# Altium PCB EVB_MBD_AK376xE_V1.0.0.PcbDoc (part 1 of 5)
Units mil, origin at the board's own origin, x right, y up, seen from the top; angles counter-clockwise.
Board outline 7060.01 x 5460.01 mil, 4 copper layers (Top, Layer 1, Layer 2, Bottom), stack 5.512 mil thick; 344 components, 305 nets, 1421 pads, 1325 vias.
Unrouted connection lines stored in the file: 947.
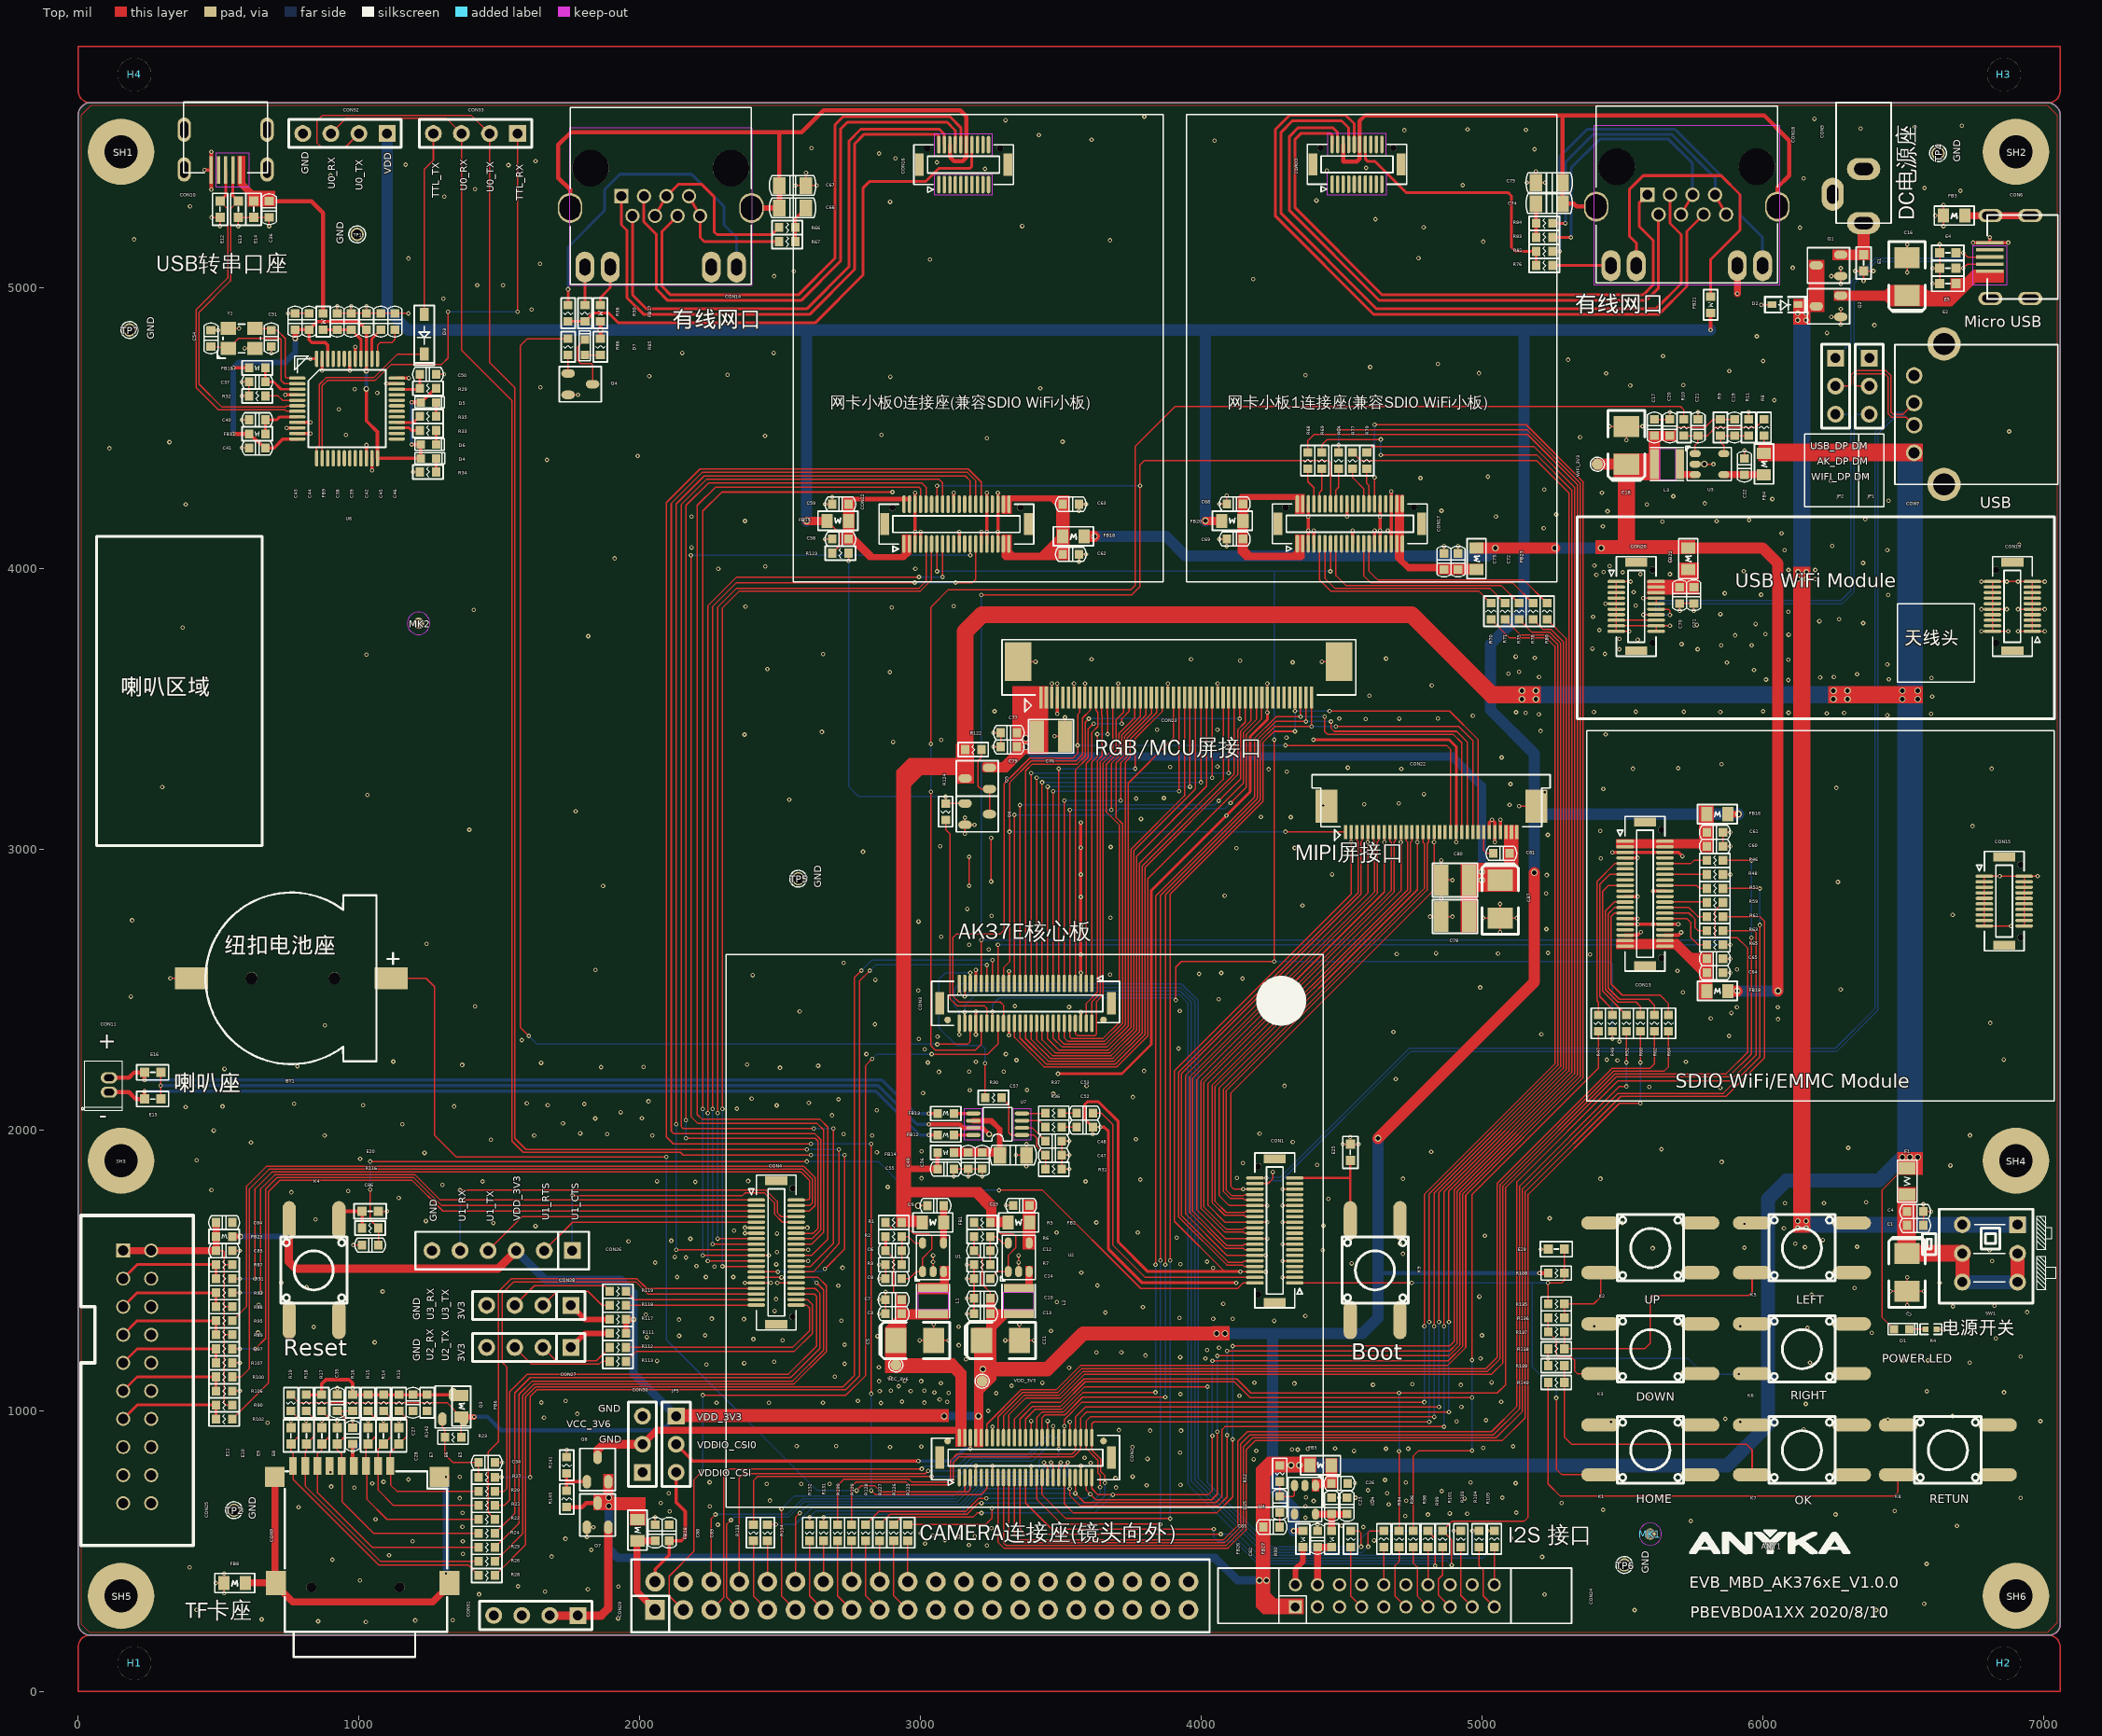
[diagram p0: Top view]
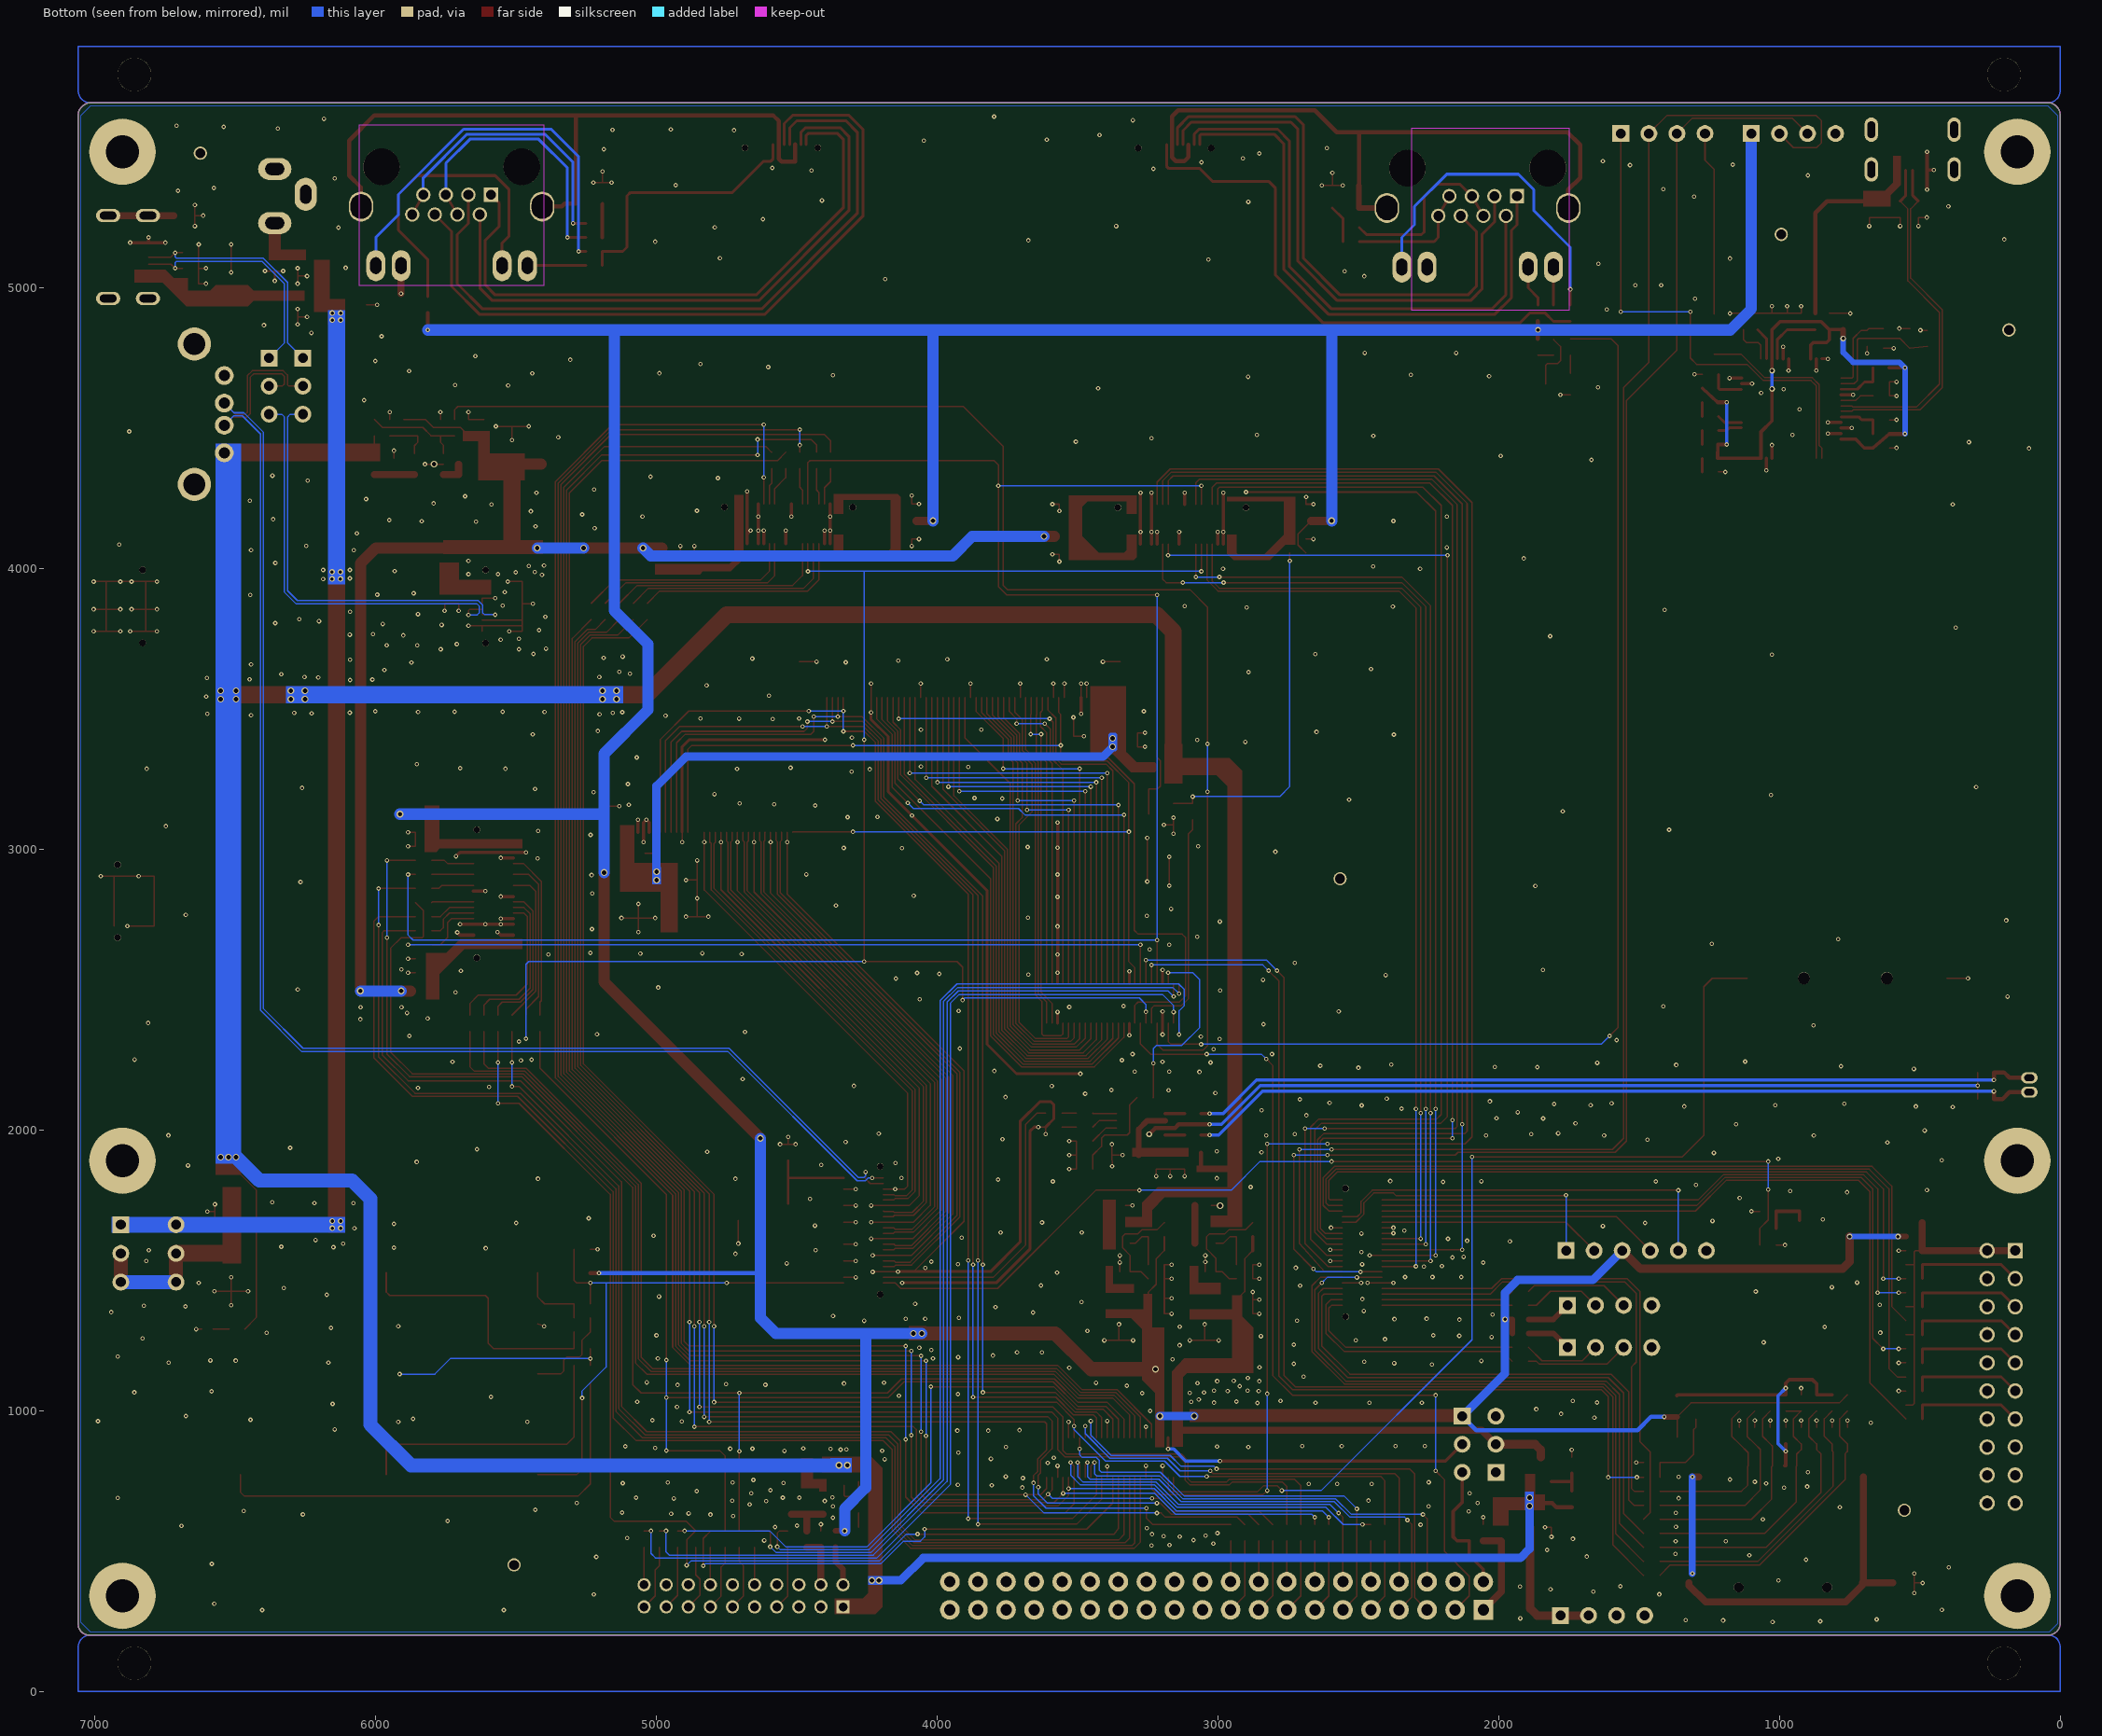
[diagram p1: Bottom view, seen from below]
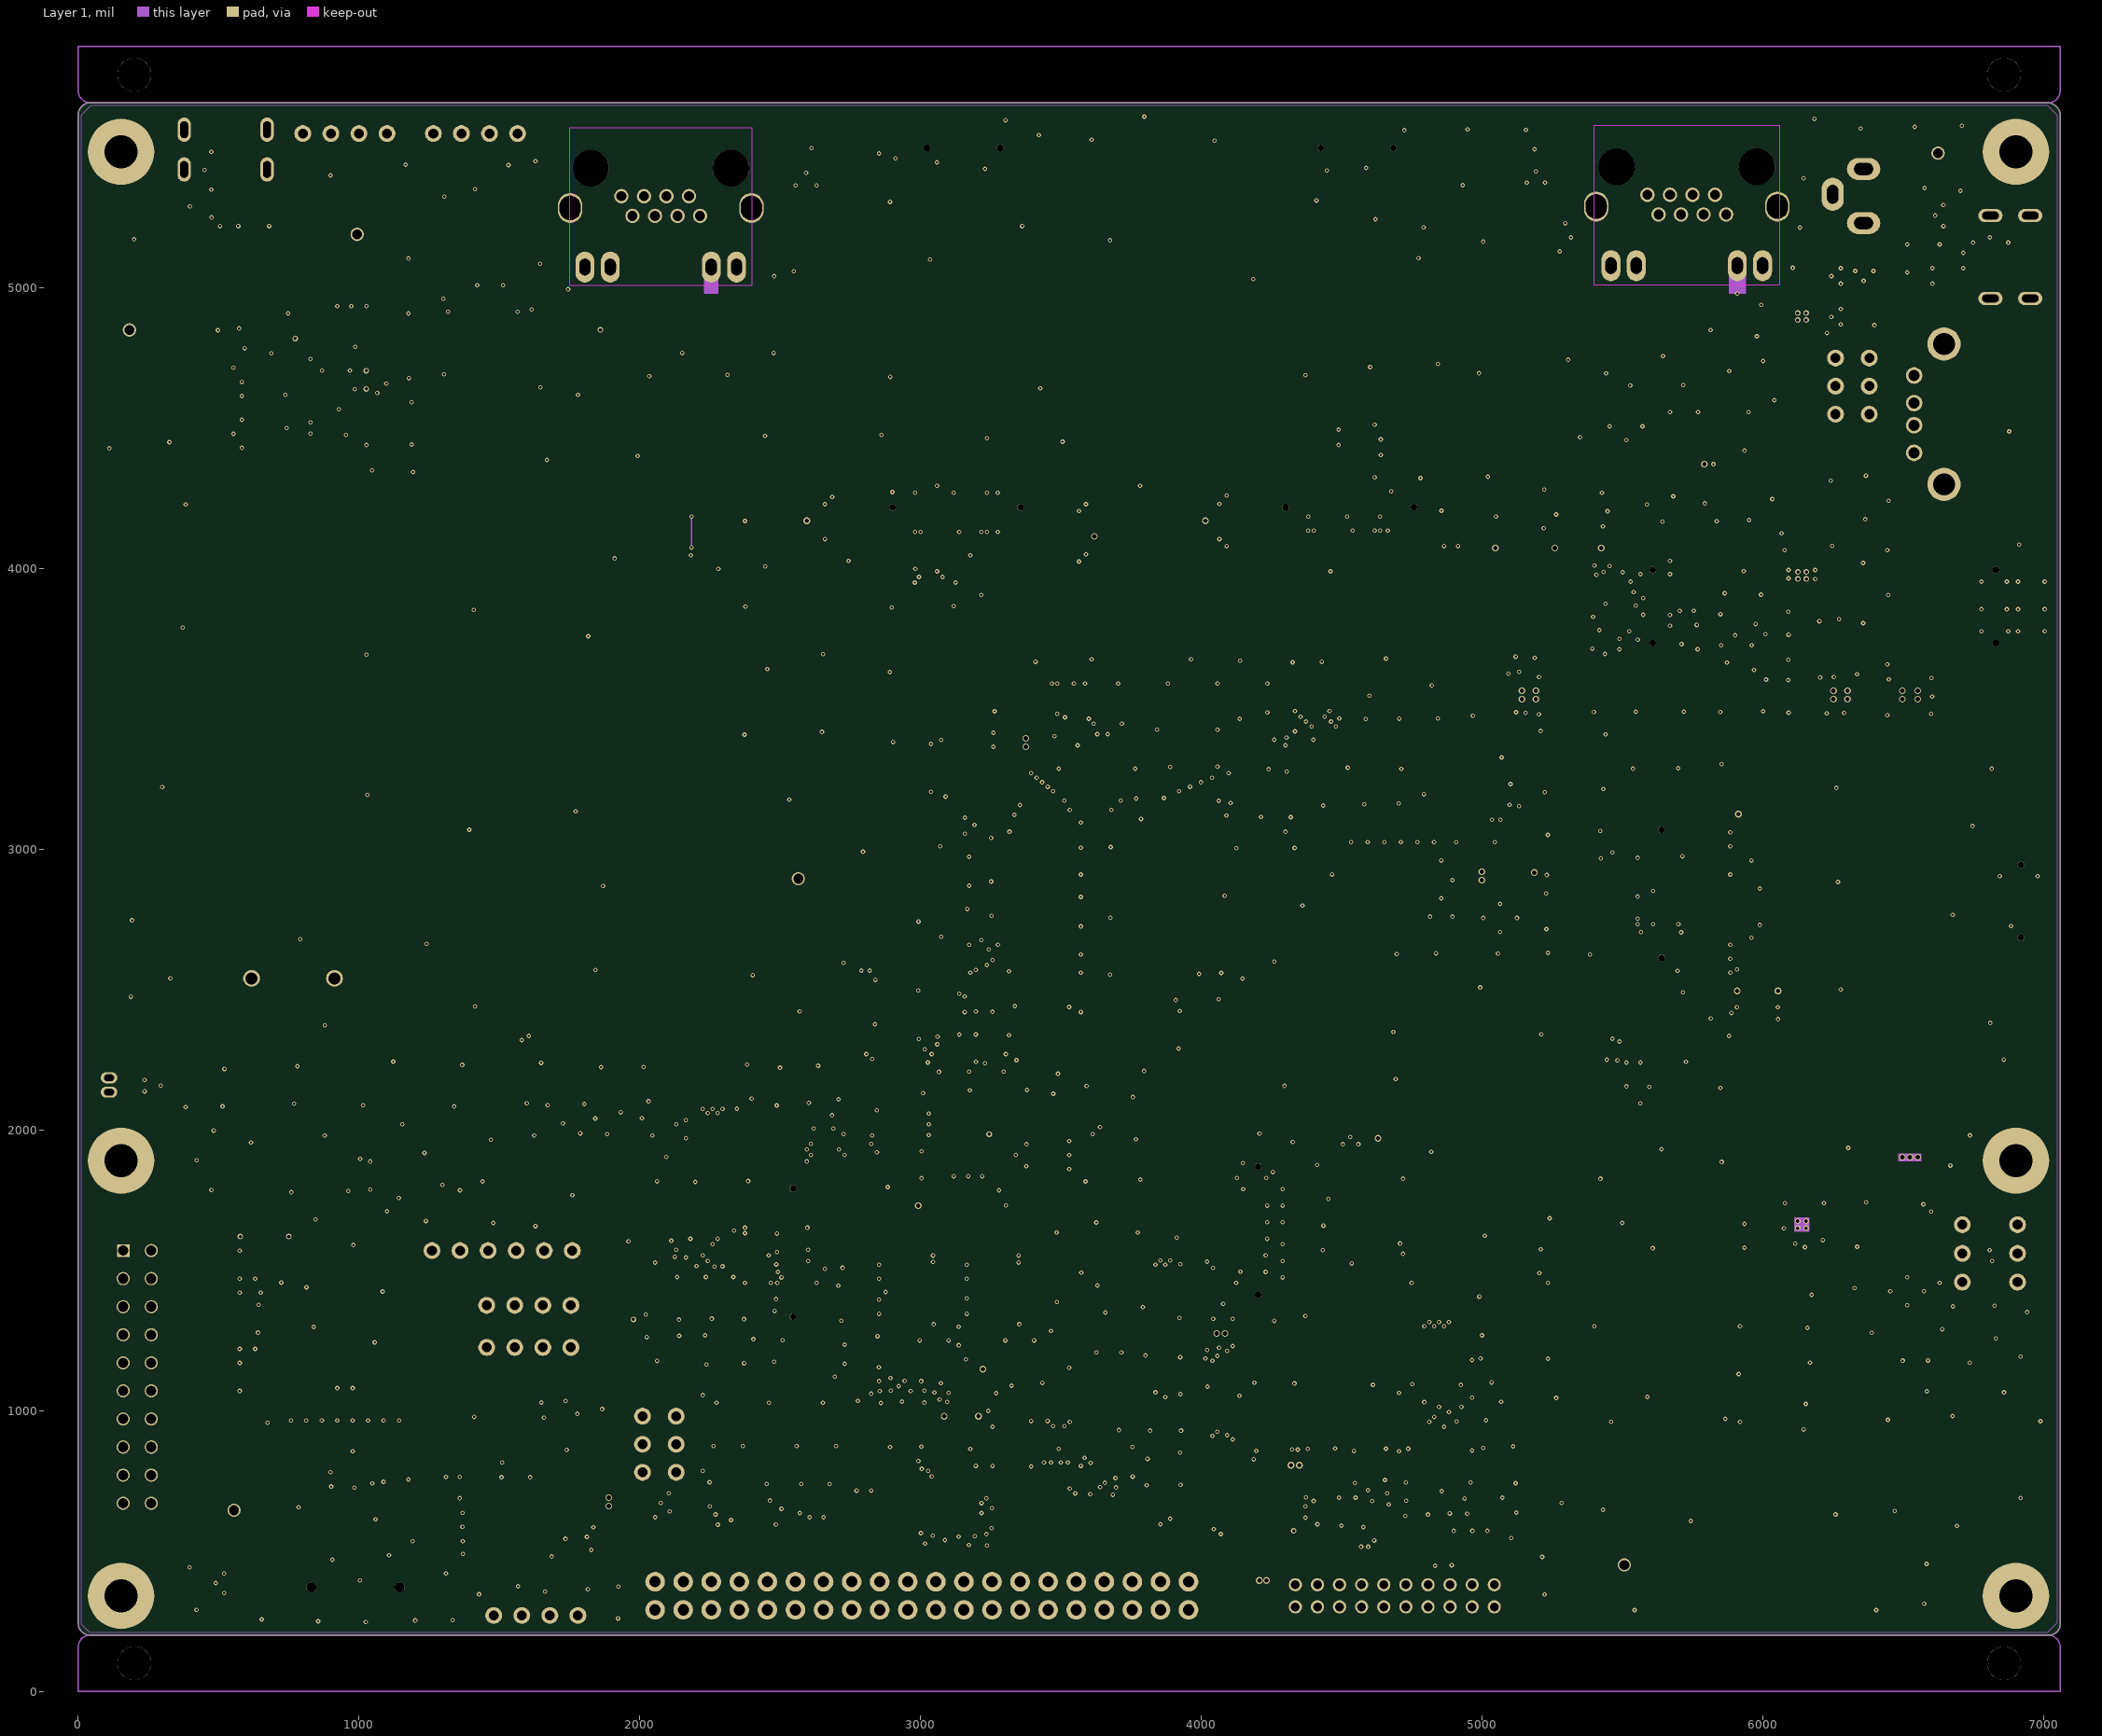
[diagram p2: Layer 1]
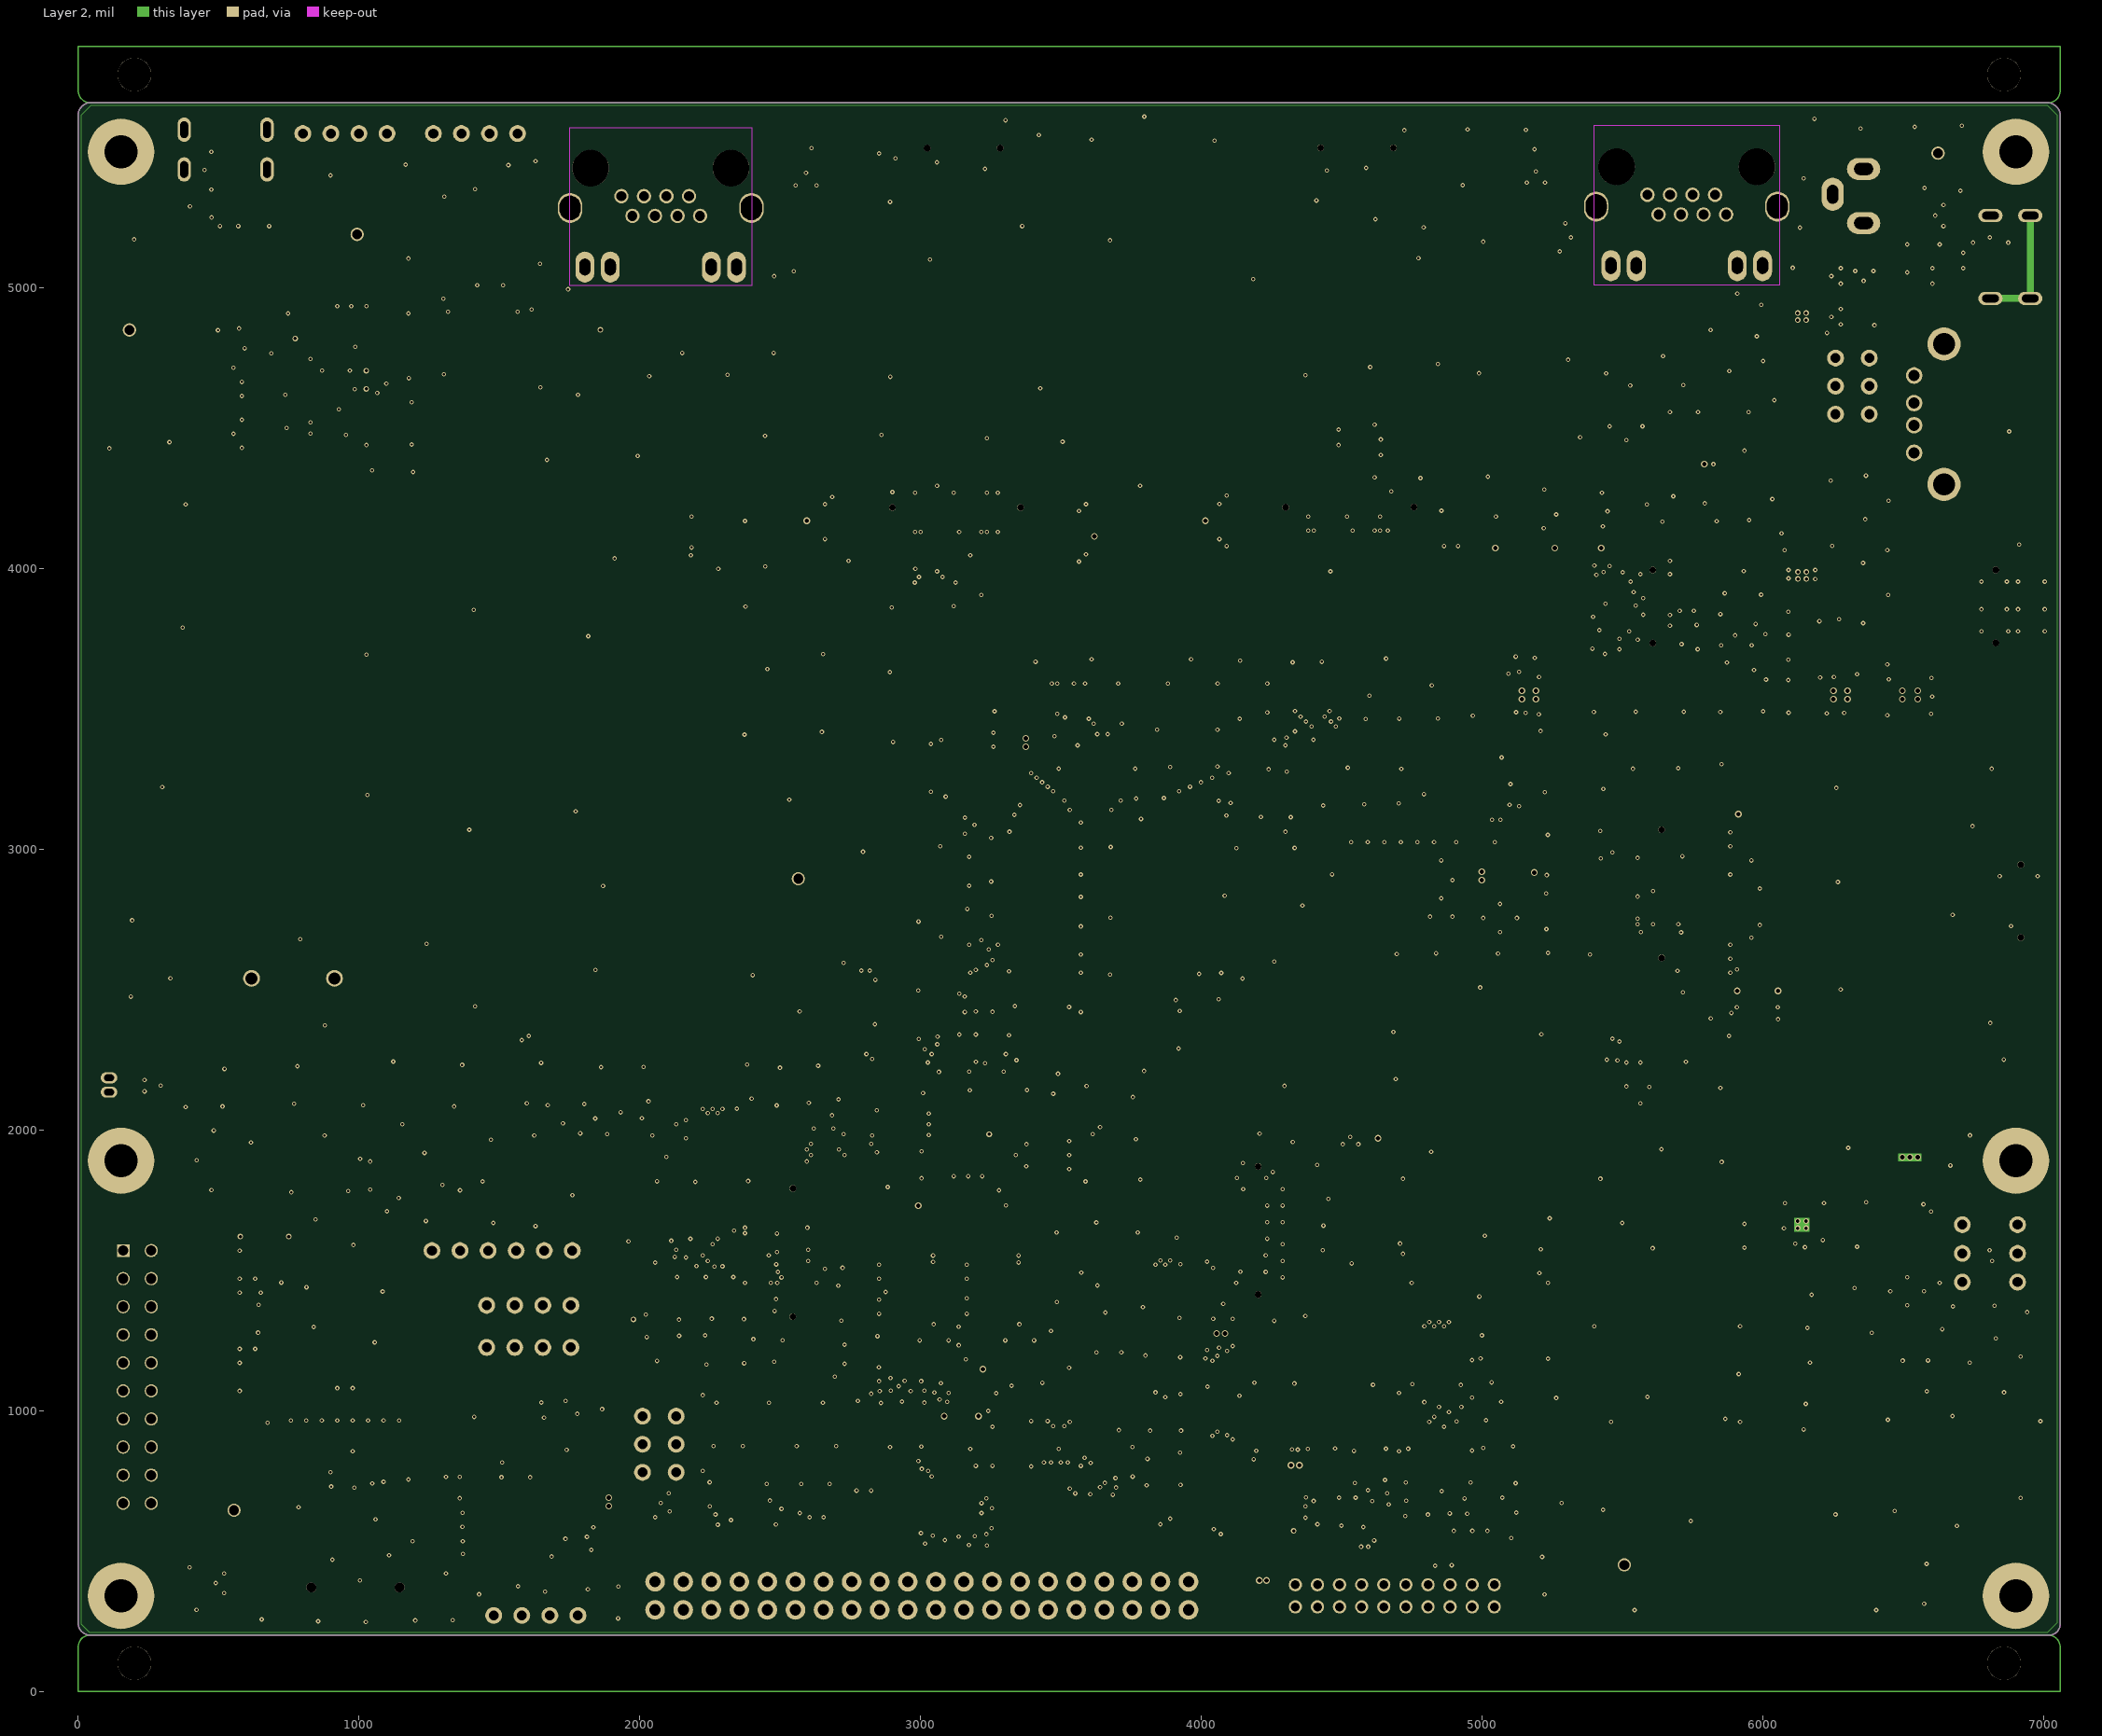
[diagram p3: Layer 2]

## Layer stack, top to bottom
Solder Mask Top: solder mask 0.4, Solder Resist, Dk 3.5
Top: signal copper 1.378
Layer 1: signal copper 1.378
Layer 2: signal copper 1.378
Bottom: signal copper 1.378
Solder Mask Bottom: solder mask 0.4, Solder Resist, Dk 3.5

## Board outline
40,200 7020,200 7020.01,200 ccw(c7020.83,239.17) 7060,240 7060,5620 7060,5619.98 ccw(c7012.25,5612.25) 7020,5660 40,5660 39.97,5660 ccw(c45.75,5614.25) 0,5620 0,240 0,239.98 ccw(c42.5,242.5)

## Design rules (kind name [scope] priority, off if disabled: settings)
Clearance "Clearance - Net - USB1_DM" [InNet('USB1_DM')] p1: gap=5 ignorepadtopadclearanceinfootprint=FALSE except(0: Arc-Hole Track-Hole SMDPad-Hole THPad-Hole Via-Hole Fill-Hole Poly-Hole Region-Hole Text-Hole; 6: SMDPad-Fill SMDPad-Poly SMDPad-Region Via-Fill Via-Poly Via-Region; 8: THPad-Fill THPad-Poly THPad-Region; 10: Text-Text)
Clearance "Clearance - Net - USB1_DP" [InNet('USB1_DP')] p2: gap=5 ignorepadtopadclearanceinfootprint=FALSE except(0: Arc-Hole Track-Hole SMDPad-Hole THPad-Hole Via-Hole Fill-Hole Poly-Hole Region-Hole Text-Hole; 7.5: SMDPad-Fill SMDPad-Poly SMDPad-Region; 8: THPad-Fill THPad-Poly THPad-Region Via-Fill Via-Poly Via-Region; 10: Text-Text)
Clearance "Clearance - Default - DEFAULT - Via" [IsVia vs IsVia] p3: gap=0 ignorepadtopadclearanceinfootprint=FALSE
Clearance "Clearance - Default - DEFAULT- SMD" [IsVia vs IsSMTPin] p4: gap=0 ignorepadtopadclearanceinfootprint=FALSE
Clearance "Clearance - Default - DEFAULT - Net" [All] p5: gap=5 ignorepadtopadclearanceinfootprint=FALSE except(0: Arc-Hole Track-Hole SMDPad-Hole THPad-Hole Via-Hole Fill-Hole Poly-Hole Region-Hole Text-Hole; 7.5: SMDPad-Fill SMDPad-Poly SMDPad-Region; 8: THPad-Fill THPad-Poly THPad-Region Via-Fill Via-Poly Via-Region Fill-Fill Fill-Poly Fill-Region Poly-Poly Poly-Region Region-Region; 10: Text-Text)
ComponentClearance "ComponentClearance - Default - DEFAULT" [All] p1: gap=0 collisioncheckmode=3 verticalgap=10 showdistances=FALSE
FanoutControl Fanout_Small [(CompPinCount < 5)] p1: bgadir=Out bgaviamode=Centered fanoutstyle=Auto fanoutdirection=OutThenIn viagrid=1 // Fanout_Small (Default Rule)
FanoutControl Fanout_BGA [IsBGA] p2: bgadir=Out bgaviamode=Centered fanoutstyle=Auto fanoutdirection=Alternating viagrid=1 // Fanout_BGA (Default Rule)
FanoutControl Fanout_LCC [IsLCC] p3: bgadir=Out bgaviamode=Centered fanoutstyle=Auto fanoutdirection=Alternating viagrid=1 // Fanout_LCC (Default Rule)
FanoutControl Fanout_SOIC [IsSOIC] p4: bgadir=Out bgaviamode=Centered fanoutstyle=Auto fanoutdirection=Alternating viagrid=1 // Fanout_SOIC (Default Rule)
HoleToHoleClearance "HoleToHoleClearance - Default - DEFAULT" [All] p1: gap=0 allowstackedmicrovias=TRUE
Length "Default Length" [All] p1: maxlimit=50000 minlimit=0
MaxMinImpedance "Default Impedance" [All] p1: minimum=50.00 maximum=150.0
ParallelSegment "Default Parallel Segment Adjasent" [All] p1: limit=1000 gap=200
ParallelSegment "Default Parallel Segment Same Layer" [All] p2: limit=1000 gap=200
PlaneConnect "Default PlaneConnect" [All] p1: planeconnectstyle=Direct reliefexpansion=20 reliefentries=4 reliefconductorwidth=10 reliefairgap=10
PolygonConnect "PolygonConnect - Default SMT" [IsSMTPin] p1: connectstyle=Direct reliefconductorwidth=10 reliefentries=4 polygonreliefangle="45 Angle" airgapwidth=10
PolygonConnect "PolygonConnect - Default Pad" [All] p2: connectstyle=Direct reliefconductorwidth=10 reliefentries=4 polygonreliefangle="45 Angle" airgapwidth=10
RoomDefinition TF_PA_UART [InComponentClass('TF_PA_UART')] p1: confinementstyle=ConfineIn formatcopy=TRUE lockcomponents=FALSE outline -19060,-24260 -17060,-24260 -17060,-23260 -19060,-23260
RoomDefinition POWER [InComponentClass('POWER')] p2: confinementstyle=ConfineIn formatcopy=TRUE lockcomponents=FALSE outline -19060,-24260 -17060,-24260 -17060,-23260 -19060,-23260
RoomDefinition MAC_EMMC_USBWIFI [InComponentClass('MAC_EMMC_USBWIFI')] p3: confinementstyle=ConfineIn formatcopy=TRUE lockcomponents=FALSE outline -19060,-24260 -17060,-24260 -17060,-23260 -19060,-23260
RoomDefinition LCD [InComponentClass('LCD')] p4: confinementstyle=ConfineIn formatcopy=TRUE lockcomponents=FALSE outline -19060,-24260 -17060,-24260 -17060,-23260 -19060,-23260
RoomDefinition JTAG_I2S_KEY [InComponentClass('JTAG_I2S_KEY')] p5: confinementstyle=ConfineIn formatcopy=TRUE lockcomponents=FALSE outline -19060,-24260 -17060,-24260 -17060,-23260 -19060,-23260
RoomDefinition INTERFACE_CORE [InComponentClass('INTERFACE_CORE')] p6: confinementstyle=ConfineIn formatcopy=TRUE lockcomponents=FALSE outline -19060,-24260 -17060,-24260 -17060,-23260 -19060,-23260
RoutingLayers "RoutingLayers - Default - DEFAULT" [All] p1: top layer_v5=TRUE mid layer 1_v5=TRUE mid layer 2_v5=TRUE bottom layer_v5=TRUE
RoutingPriority "RoutingPriority - Default - DEFAULT" [All] p1: routingpriority=0
RoutingTopology "Default Routing Topology" [All] p1: topology=Shortest
RoutingVias "RoutingVias - Default - DEFAULT" [All] p1: holewidth=16 width=24 viastyle="Through Hole" minholewidth=16 minwidth=24 maxholewidth=16 maxwidth=24
SMDToCorner "SMDToCorner - Default - DEFAULT" [All] p1: distance=0
SolderMaskExpansion [All] p1: expansion=4 istentingtop=FALSE
Width "Default Width" [All] p1: maxlimit=100 minlimit=5 preferedwidth=5
18 further rules are at their usual default settings.

## Classes and differential pairs
component class TF_PA_UART: C27 C28 C34 C35 C36 C37 C38 C39 C40 C41 C42 C43 C44 C45 C46 C47 C48 C49 C50 C51 C52 C53 C54 C55 C56 C57 CON9 CON10 CON11 CON32 CON33 D3 D4 D5 D6 E5 E6 E7 E8 E9 E10 E11 E12 E13 E14 E15 E16 FB6 FB8 FB9 FB10 FB11 FB12 FB13 FB14 Q3 R13 R14 R15 R16 R17 R18 R19 R20 R21 R22 R23 R24 R25 R26 R27 R28 R29 R30 R31 R32 R33 R34 R35 R36 R37 R142 U6 U7 Y1
component class POWER: BT1 C1 C2 C3 C4 C5 C6 C7 C8 C9 C10 C11 C12 C13 C14 C15 C16 C17 C18 C19 C20 C21 C22 C23 C24 C25 C26 CON5 CON6 CON7 CON30 CON31 D1 D2 E1 E2 E3 E4 F1 FB1 FB2 FB3 FB4 FB5 JP1 JP2 JP5 L1 L2 L3 Q1 Q2 Q7 Q8 R1 R2 R3 R4 R5 R6 R7 R8 R9 R10 R11 R12 R141 R143 SW1 U1 U2 U3 U4 VCC_3V6 VDD_3V3 WIFI_3V3
component class MAC_EMMC_USBWIFI: C58 C59 C60 C61 C62 C63 C64 C65 C66 C67 C68 C69 C70 C71 C72 C73 C74 C75 CON12 CON13 CON14 CON15 CON16 CON17 CON18 CON19 CON20 CON21 FB15 FB16 FB17 FB18 FB19 FB20 FB21 FB22 FB23 R46 R47 R48 R49 R50 R51 R52 R58 R59 R60 R61 R62 R63 R64 R65 R66 R67 R76 R81 R83 R84
component class LCD: C76 C77 C78 C79 C80 C81 C87 C88 C89 CON22 CON23 CON29 D7 FB28 Q4 Q5 Q6 R68 R69 R70 R71 R74 R75 R77 R78 R79 R80 R85 R86 R122 R123 R124 R125 R126 R127 R128 R129 R130 R131 R132 R133 R134 TP1 TP2 TP4 TP5 TP6 TP7
component class JTAG_I2S_KEY: C82 C83 C84 C85 C86 CON24 CON25 CON26 CON27 CON28 E19 E20 E25 FB25 FB26 FB27 K1 K2 K3 K4 K5 K6 K7 K8 K9 R87 R88 R89 R90 R91 R92 R93 R94 R95 R96 R97 R98 R99 R100 R101 R102 R103 R104 R105 R106 R107 R108 R111 R112 R113 R116 R117 R118 R119 R135 R136 R137 R138 R139 R140
component class INTERFACE_CORE: CON1 CON2 CON3 CON4

## Components (designator, comment, footprint, x,y, rotation, side; value= is the part's Value field where it differs from the comment)
ANY1 "LOGO_ANYKA" FileName=\\172.10.10.37\部门文件夹\系统平台研发中心\系统硬件部\AD_Library\AD_Footprint.PcbLib#1 6027.5,517.5 r0 top
BT1 "BAT_CR1220" FileName=\\172.10.10.37\部门文件夹\系统平台研发中心\系统硬件部\AD_Library\\AD_Footprint.PcbLib#1 767,2540 r0 top value=BAT/CR1220
C1 "C0603" FileName=\\172.10.10.37\部门文件夹\系统平台研发中心\系统硬件部\AD_Library\\AD_Footprint.PcbLib#2 6544,1660 r180 top value=100nF
C2 "220uF" FileName=\\172.10.10.37\部门文件夹\系统平台研发中心\系统硬件部\AD_Library\\AD_Footprint.PcbLib#3 6515,1492.5 r90 top value=220uF/6.3V
C3 "C0603" FileName=\\172.10.10.37\部门文件夹\系统平台研发中心\系统硬件部\AD_Library\\AD_Footprint.PcbLib#2 2905,1344.72 r0 top value=100nF
C4 "4.7uF" FileName=\\172.10.10.37\部门文件夹\系统平台研发中心\系统硬件部\AD_Library\\AD_Footprint.PcbLib#2 6544,1709 r0 top
C5 "220uF" FileName=\\172.10.10.37\部门文件夹\系统平台研发中心\系统硬件部\AD_Library\\AD_Footprint.PcbLib#3 2980,1250 r180 top value=220uF/6.3V
C6 "10pF" FileName=\\172.10.10.37\部门文件夹\系统平台研发中心\系统硬件部\AD_Library\\AD_Footprint.PcbLib#2 2905,1570 r0 top
C7 "10uF" FileName=\\172.10.10.37\部门文件夹\系统平台研发中心\系统硬件部\AD_Library\\AD_Footprint.PcbLib#2 2905,1395 r180 top
C8 "C0603" FileName=\\172.10.10.37\部门文件夹\系统平台研发中心\系统硬件部\AD_Library\\AD_Footprint.PcbLib#2 2905,1470 r0 top value=NC/100nF
C9 "4.7uF" FileName=\\172.10.10.37\部门文件夹\系统平台研发中心\系统硬件部\AD_Library\\AD_Footprint.PcbLib#2 3053.4,1730 r180 top
C10 "C0603" FileName=\\172.10.10.37\部门文件夹\系统平台研发中心\系统硬件部\AD_Library\\AD_Footprint.PcbLib#2 3220,1400 r0 top value=100nF
C11 "220uF" FileName=\\172.10.10.37\部门文件夹\系统平台研发中心\系统硬件部\AD_Library\\AD_Footprint.PcbLib#3 3285,1250 r180 top value=220uF/6.3V
C12 "10pF" FileName=\\172.10.10.37\部门文件夹\系统平台研发中心\系统硬件部\AD_Library\\AD_Footprint.PcbLib#2 3220,1570 r0 top
C13 "10uF" FileName=\\172.10.10.37\部门文件夹\系统平台研发中心\系统硬件部\AD_Library\\AD_Footprint.PcbLib#2 3220,1344.72 r180 top
C14 "C0603" FileName=\\172.10.10.37\部门文件夹\系统平台研发中心\系统硬件部\AD_Library\\AD_Footprint.PcbLib#2 3220,1470 r0 top value=NC/100nF
C15 "4.7uF" FileName=\\172.10.10.37\部门文件夹\系统平台研发中心\系统硬件部\AD_Library\\AD_Footprint.PcbLib#2 3359,1731 r180 top
C16 "220uF" FileName=\\172.10.10.37\部门文件夹\系统平台研发中心\系统硬件部\AD_Library\\AD_Footprint.PcbLib#3 6515,5040 r270 top value=220uF/6.3V
C17 "C0603" FileName=\\172.10.10.37\部门文件夹\系统平台研发中心\系统硬件部\AD_Library\\AD_Footprint.PcbLib#2 5614.72,4502.5 r270 top value=100nF
C18 "220uF" FileName=\\172.10.10.37\部门文件夹\系统平台研发中心\系统硬件部\AD_Library\\AD_Footprint.PcbLib#3 5515,4439.1 r270 top value=220uF/6.3V
C19 "10pF" FileName=\\172.10.10.37\部门文件夹\系统平台研发中心\系统硬件部\AD_Library\\AD_Footprint.PcbLib#2 5900,4502.5 r270 top
C20 "10uF" FileName=\\172.10.10.37\部门文件夹\系统平台研发中心\系统硬件部\AD_Library\\AD_Footprint.PcbLib#2 5670,4502.5 r90 top
C21 "C0603" FileName=\\172.10.10.37\部门文件夹\系统平台研发中心\系统硬件部\AD_Library\\AD_Footprint.PcbLib#2 5770,4502.5 r270 top value=NC/100nF
C22 "4.7uF" FileName=\\172.10.10.37\部门文件夹\系统平台研发中心\系统硬件部\AD_Library\\AD_Footprint.PcbLib#2 5935,4363.5 r90 top
C23 "C0603" FileName=\\172.10.10.37\部门文件夹\系统平台研发中心\系统硬件部\AD_Library\\AD_Footprint.PcbLib#2 4465,660 r270 top value=100nF
C24 "10uF" FileName=\\172.10.10.37\部门文件夹\系统平台研发中心\系统硬件部\AD_Library\\AD_Footprint.PcbLib#2 4520,660 r90 top
C25 "C0603" FileName=\\172.10.10.37\部门文件夹\系统平台研发中心\系统硬件部\AD_Library\\AD_Footprint.PcbLib#2 4280,665 r90 top value=NC/100nF
C26 "4.7uF" FileName=\\172.10.10.37\部门文件夹\系统平台研发中心\系统硬件部\AD_Library\\AD_Footprint.PcbLib#2 4492.5,740 r0 top
C27 "100nF" FileName=\\172.10.10.37\部门文件夹\系统平台研发中心\系统硬件部\AD_Library\\AD_Footprint.PcbLib#2 1192.5,1027.5 r270 top
C28 "10uF" FileName=\\172.10.10.37\部门文件夹\系统平台研发中心\系统硬件部\AD_Library\\AD_Footprint.PcbLib#2 977.5,910 r90 top
C34 "100nF" FileName=\\172.10.10.37\部门文件夹\系统平台研发中心\系统硬件部\AD_Library\\AD_Footprint.PcbLib#2 1455,815 r0 top
C35 "NC/100nF" FileName=\\172.10.10.37\部门文件夹\系统平台研发中心\系统硬件部\AD_Library\\AD_Footprint.PcbLib#2 922.5,1027.5 r90 top
C36 "10uF" FileName=\\172.10.10.37\部门文件夹\系统平台研发中心\系统硬件部\AD_Library\\AD_Footprint.PcbLib#2 680,5280 r90 top
C37 "100nF" FileName=\\172.10.10.37\部门文件夹\系统平台研发中心\系统硬件部\AD_Library\\AD_Footprint.PcbLib#2 637.5,4665 r180 top
C38 "100nF" FileName=\\172.10.10.37\部门文件夹\系统平台研发中心\系统硬件部\AD_Library\\AD_Footprint.PcbLib#2 922.5,4880 r90 top
C39 "10uF" FileName=\\172.10.10.37\部门文件夹\系统平台研发中心\系统硬件部\AD_Library\\AD_Footprint.PcbLib#2 972.5,4880 r90 top
C40 "100nF" FileName=\\172.10.10.37\部门文件夹\系统平台研发中心\系统硬件部\AD_Library\\AD_Footprint.PcbLib#2 637.5,4530 r180 top
C41 "100nF" FileName=\\172.10.10.37\部门文件夹\系统平台研发中心\系统硬件部\AD_Library\\AD_Footprint.PcbLib#2 637.5,4430 r180 top
C42 "100nF" FileName=\\172.10.10.37\部门文件夹\系统平台研发中心\系统硬件部\AD_Library\\AD_Footprint.PcbLib#2 1026.4,4880 r90 top
C43 "100nF" FileName=\\172.10.10.37\部门文件夹\系统平台研发中心\系统硬件部\AD_Library\\AD_Footprint.PcbLib#2 772.5,4880 r90 top
C44 "10uF" FileName=\\172.10.10.37\部门文件夹\系统平台研发中心\系统硬件部\AD_Library\\AD_Footprint.PcbLib#2 822.5,4880 r90 top
C45 "100nF" FileName=\\172.10.10.37\部门文件夹\系统平台研发中心\系统硬件部\AD_Library\\AD_Footprint.PcbLib#2 1077.5,4880 r90 top
C46 "100nF" FileName=\\172.10.10.37\部门文件夹\系统平台研发中心\系统硬件部\AD_Library\\AD_Footprint.PcbLib#2 1127.5,4880 r90 top
C47 "100nF" FileName=\\172.10.10.37\部门文件夹\系统平台研发中心\系统硬件部\AD_Library\\AD_Footprint.PcbLib#2 3475,1910 r0 top
C48 "1uF" FileName=\\172.10.10.37\部门文件夹\系统平台研发中心\系统硬件部\AD_Library\\AD_Footprint.PcbLib#2 3475,1960 r0 top
C49 "100nF" FileName=\\172.10.10.37\部门文件夹\系统平台研发中心\系统硬件部\AD_Library\\AD_Footprint.PcbLib#2 3170,1890 r270 top
C50 "10uF" FileName=\\172.10.10.37\部门文件夹\系统平台研发中心\系统硬件部\AD_Library\\AD_Footprint.PcbLib#2 1245.5,4692 r0 top
C51 "18pF" FileName=\\172.10.10.37\部门文件夹\系统平台研发中心\系统硬件部\AD_Library\\AD_Footprint.PcbLib#2 687.5,4820 r270 top
C52 "1nF" FileName=\\172.10.10.37\部门文件夹\系统平台研发中心\系统硬件部\AD_Library\\AD_Footprint.PcbLib#2 3585,2010 r180 top
C53 "1nF" FileName=\\172.10.10.37\部门文件夹\系统平台研发中心\系统硬件部\AD_Library\\AD_Footprint.PcbLib#2 3585,2060 r180 top
C54 "18pF" FileName=\\172.10.10.37\部门文件夹\系统平台研发中心\系统硬件部\AD_Library\\AD_Footprint.PcbLib#2 472.5,4820 r90 top
C55 "100nF" FileName=\\172.10.10.37\部门文件夹\系统平台研发中心\系统硬件部\AD_Library\\AD_Footprint.PcbLib#2 3090,1861 r0 top
C56 "10uF" FileName=\\172.10.10.37\部门文件夹\系统平台研发中心\系统硬件部\AD_Library\\AD_Footprint.PcbLib#2 3220,1890 r270 top
C57 "22uF" FileName=\\172.10.10.37\部门文件夹\系统平台研发中心\系统硬件部\AD_Library\\AD_Footprint.PcbLib#4 3330,1910 r90 top
C58 "4.7uF" FileName=\\172.10.10.37\部门文件夹\系统平台研发中心\系统硬件部\AD_Library\\AD_Footprint.PcbLib#2 2715,4105 r180 top
C59 "10uF" FileName=\\172.10.10.37\部门文件夹\系统平台研发中心\系统硬件部\AD_Library\\AD_Footprint.PcbLib#2 2715,4229.29 r180 top
C60 "4.7uF" FileName=\\172.10.10.37\部门文件夹\系统平台研发中心\系统硬件部\AD_Library\\AD_Footprint.PcbLib#2 5830,3010 r0 top
C61 "10uF" FileName=\\172.10.10.37\部门文件夹\系统平台研发中心\系统硬件部\AD_Library\\AD_Footprint.PcbLib#2 5830,3060 r0 top
C62 "4.7uF" FileName=\\172.10.10.37\部门文件夹\系统平台研发中心\系统硬件部\AD_Library\\AD_Footprint.PcbLib#2 3536,4051 r0 top
C63 "10uF" FileName=\\172.10.10.37\部门文件夹\系统平台研发中心\系统硬件部\AD_Library\\AD_Footprint.PcbLib#2 3536,4229.29 r0 top
C64 "4.7uF" FileName=\\172.10.10.37\部门文件夹\系统平台研发中心\系统硬件部\AD_Library\\AD_Footprint.PcbLib#2 5830,2560 r0 top
C65 "10uF" FileName=\\172.10.10.37\部门文件夹\系统平台研发中心\系统硬件部\AD_Library\\AD_Footprint.PcbLib#2 5830,2610 r0 top
C66 "1nF" FileName=\\172.10.10.37\部门文件夹\系统平台研发中心\系统硬件部\AD_Library\\AD_Footprint.PcbLib#4 2545,5284.82 r270 top
C67 "1nF" FileName=\\172.10.10.37\部门文件夹\系统平台研发中心\系统硬件部\AD_Library\\AD_Footprint.PcbLib#4 2545,5365 r270 top
C68 "4.7uF" FileName=\\172.10.10.37\部门文件夹\系统平台研发中心\系统硬件部\AD_Library\\AD_Footprint.PcbLib#2 4120,4230.31 r180 top
C69 "10uF" FileName=\\172.10.10.37\部门文件夹\系统平台研发中心\系统硬件部\AD_Library\\AD_Footprint.PcbLib#2 4120,4105 r180 top
C70 "100nF" FileName=\\172.10.10.37\部门文件夹\系统平台研发中心\系统硬件部\AD_Library\\AD_Footprint.PcbLib#2 5705,3905 r270 top
C71 "4.7uF" FileName=\\172.10.10.37\部门文件夹\系统平台研发中心\系统硬件部\AD_Library\\AD_Footprint.PcbLib#2 5755,3905 r270 top
C72 "4.7uF" FileName=\\172.10.10.37\部门文件夹\系统平台研发中心\系统硬件部\AD_Library\\AD_Footprint.PcbLib#2 4915,4025 r90 top
C73 "10uF" FileName=\\172.10.10.37\部门文件夹\系统平台研发中心\系统硬件部\AD_Library\\AD_Footprint.PcbLib#2 4865,4025 r90 top
C74 "1nF" FileName=\\172.10.10.37\部门文件夹\系统平台研发中心\系统硬件部\AD_Library\\AD_Footprint.PcbLib#4 5240,5300 r90 top
C75 "1nF" FileName=\\172.10.10.37\部门文件夹\系统平台研发中心\系统硬件部\AD_Library\\AD_Footprint.PcbLib#4 5240,5375 r90 top
C76 "47uF" FileName=\\172.10.10.37\部门文件夹\系统平台研发中心\系统硬件部\AD_Library\\AD_Footprint.PcbLib#5 3465,3402.5 r180 top
C77 "100nF" FileName=\\172.10.10.37\部门文件夹\系统平台研发中心\系统硬件部\AD_Library\\AD_Footprint.PcbLib#2 3315,3415 r0 top
C78 "47uF" FileName=\\172.10.10.37\部门文件夹\系统平台研发中心\系统硬件部\AD_Library\\AD_Footprint.PcbLib#5 4905,2760 r180 top
C79 "100nF" FileName=\\172.10.10.37\部门文件夹\系统平台研发中心\系统硬件部\AD_Library\\AD_Footprint.PcbLib#2 3315,3365 r180 top
C80 "47uF" FileName=\\172.10.10.37\部门文件夹\系统平台研发中心\系统硬件部\AD_Library\\AD_Footprint.PcbLib#5 4905,2890 r180 top
C81 "100nF" FileName=\\172.10.10.37\部门文件夹\系统平台研发中心\系统硬件部\AD_Library\\AD_Footprint.PcbLib#2 5070,2985 r180 top
C82 "4.7uF" FileName=\\172.10.10.37\部门文件夹\系统平台研发中心\系统硬件部\AD_Library\\AD_Footprint.PcbLib#2 4414.41,542.5 r90 top
C83 "4.7uF" FileName=\\172.10.10.37\部门文件夹\系统平台研发中心\系统硬件部\AD_Library\\AD_Footprint.PcbLib#2 4251,585 r180 top
C84 "100nF" FileName=\\172.10.10.37\部门文件夹\系统平台研发中心\系统硬件部\AD_Library\\AD_Footprint.PcbLib#2 520,1670 r0 top
C85 "4.7uF" FileName=\\172.10.10.37\部门文件夹\系统平台研发中心\系统硬件部\AD_Library\\AD_Footprint.PcbLib#2 520,1570 r0 top
C86 "NC/4.7uF" FileName=\\172.10.10.37\部门文件夹\系统平台研发中心\系统硬件部\AD_Library\\AD_Footprint.PcbLib#2 1040,1590 r180 top
C87 "220uF" FileName=\\172.10.10.37\部门文件夹\系统平台研发中心\系统硬件部\AD_Library\\AD_Footprint.PcbLib#3 5065,2822.5 r90 top value=220uF/6.3V
C88 "10uF" FileName=\\172.10.10.37\部门文件夹\系统平台研发中心\系统硬件部\AD_Library\\AD_Footprint.PcbLib#2 2055,565 r270 top
C89 "1uF" FileName=\\172.10.10.37\部门文件夹\系统平台研发中心\系统硬件部\AD_Library\\AD_Footprint.PcbLib#2 2105,565 r90 top
CON1 "CON20X2_0MM5_BTB_DF12" FileName=\\172.10.10.37\部门文件夹\系统平台研发中心\系统硬件部\AD_Library\\AD_Footprint.PcbLib#6 4262.5,1641.75 r90 top
CON2 "CON25X2_0MM5_BTB_DF12" FileName=\\172.10.10.37\部门文件夹\系统平台研发中心\系统硬件部\AD_Library\\AD_Footprint.PcbLib#7 3374.51,832.5 r0 top
CON3 "CON25X2_0MM5_BTB_DF12" FileName=\\172.10.10.37\部门文件夹\系统平台研发中心\系统硬件部\AD_Library\\AD_Footprint.PcbLib#7 3374.51,2451 r180 top
CON4 "CON20X2_0MM5_BTB_DF12" FileName=\\172.10.10.37\部门文件夹\系统平台研发中心\系统硬件部\AD_Library\\AD_Footprint.PcbLib#6 2486.52,1563.01 r270 top
CON5 "CNDCF0302" FileName=\\172.10.10.37\部门文件夹\系统平台研发中心\系统硬件部\AD_Library\\AD_Footprint.PcbLib#8 6360,5660 r270 top
CON6 "USB_MICRO-5P/F_SMT" FileName=\\172.10.10.37\部门文件夹\系统平台研发中心\系统硬件部\AD_Library\\AD_Footprint.PcbLib#9 6800,5110 r90 top value=MINI_USB_9P
CON7 "USB-1400-DIP" FileName=\\172.10.10.37\部门文件夹\系统平台研发中心\系统硬件部\AD_Library\\AD_Footprint.PcbLib#10 6540,4550 r270 top
CON9 "TF_CARD_13P" FileName=\\172.10.10.37\部门文件夹\系统平台研发中心\系统硬件部\AD_Library\\AD_Footprint.PcbLib#11 987.5,370 r0 top value=TFCARD_AK98XX_PLATFORM
CON10 "USB_MICRO-5P/F_SMT" FileName=\\172.10.10.37\部门文件夹\系统平台研发中心\系统硬件部\AD_Library\\AD_Footprint.PcbLib#9 525,5410 r180 top value=MINI_USB_9P
CON11 "SIP_2P_1_25MMPTH" FileName=\\172.10.10.37\部门文件夹\系统平台研发中心\系统硬件部\AD_Library\\AD_Footprint.PcbLib#12 90,2160 r90 top
CON12 "CON20X2_0MM5_BTB_DF12" FileName=\\172.10.10.37\部门文件夹\系统平台研发中心\系统硬件部\AD_Library\\AD_Footprint.PcbLib#6 3128.31,4158.42 r0 top
CON13 "CON20X2_0MM5_BTB_DF12" FileName=\\172.10.10.37\部门文件夹\系统平台研发中心\系统硬件部\AD_Library\\AD_Footprint.PcbLib#6 5581.13,2841.34 r270 top
CON14 "RJ45-8_PTH" FileName=\\172.10.10.37\部门文件夹\系统平台研发中心\系统硬件部\AD_Library\\AD_Footprint.PcbLib#13 2075,5055 r180 top value=RJ45-8
CON15 "CON10X2_0MM5_BTB_DF12" FileName=\\172.10.10.37\部门文件夹\系统平台研发中心\系统硬件部\AD_Library\\AD_Footprint.PcbLib#14 6860.87,2815.16 r270 top
CON16 "CON10X2_0MM5_BTB_DF12" FileName=\\172.10.10.37\部门文件夹\系统平台研发中心\系统硬件部\AD_Library\\AD_Footprint.PcbLib#14 3153.9,5439.13 r0 top
CON17 "CON20X2_0MM5_BTB_DF12" FileName=\\172.10.10.37\部门文件夹\系统平台研发中心\系统硬件部\AD_Library\\AD_Footprint.PcbLib#6 4529.57,4159.45 r0 top
CON18 "RJ45-8_PTH" FileName=\\172.10.10.37\部门文件夹\系统平台研发中心\系统硬件部\AD_Library\\AD_Footprint.PcbLib#13 5730,5060 r180 top value=RJ45-8
CON19 "CON10X2_0MM5_BTB_DF12" FileName=\\172.10.10.37\部门文件夹\系统平台研发中心\系统硬件部\AD_Library\\AD_Footprint.PcbLib#14 6890,3865 r90 top
CON20 "CON10X2_0MM5_BTB_DF12" FileName=\\172.10.10.37\部门文件夹\系统平台研发中心\系统硬件部\AD_Library\\AD_Footprint.PcbLib#14 5550,3865 r270 top
CON21 "CON10X2_0MM5_BTB_DF12" FileName=\\172.10.10.37\部门文件夹\系统平台研发中心\系统硬件部\AD_Library\\AD_Footprint.PcbLib#14 4555.16,5440.16 r0 top
CON22 "FPC_32_0MM5" FileName=\\172.10.10.37\部门文件夹\系统平台研发中心\系统硬件部\AD_Library\\AD_Footprint.PcbLib#15 4820,3100 r180 top
CON23 "FPC-50P-0.5MM" FileName=\\172.10.10.37\部门文件夹\系统平台研发中心\系统硬件部\AD_Library\\AD_Footprint.PcbLib#16 3911.13,3540 r180 top value=FPC-50P-0.5mm
CON24 "CON10X2_2MM0" FileName=\\172.10.10.37\部门文件夹\系统平台研发中心\系统硬件部\AD_Library\\AD_Footprint.PcbLib#17 4690,340 r0 top value=CON10X2_2MM
CON25 "NC/JTAG_TRACE20_MALE" FileName=\\172.10.10.37\部门文件夹\系统平台研发中心\系统硬件部\AD_Library\\AD_Footprint.PcbLib#18 160,1570 r270 top
CON26 "NC/CON6_2MM54" FileName=\\172.10.10.37\部门文件夹\系统平台研发中心\系统硬件部\AD_Library\\AD_Footprint.PcbLib#19 1760,1570 r180 top
CON27 "NC/CON4_2MM54，MALE" FileName=\\172.10.10.37\部门文件夹\系统平台研发中心\系统硬件部\AD_Library\\AD_Footprint.PcbLib#20 1755,1225 r180 top
CON28 "NC/CON4_2MM54，MALE" FileName=\\172.10.10.37\部门文件夹\系统平台研发中心\系统硬件部\AD_Library\\AD_Footprint.PcbLib#20 1755,1375 r180 top
CON29 "CON20X2_2MM54" FileName=\\172.10.10.37\部门文件夹\系统平台研发中心\系统硬件部\AD_Library\\AD_Footprint.PcbLib#21 2055,290 r0 top
CON30 "NC/CON4_2MM54,Female" FileName=\\172.10.10.37\部门文件夹\系统平台研发中心\系统硬件部\AD_Library\\AD_Footprint.PcbLib#22 2010,780 r90 top
CON31 "NC/CON4_2MM54，MALE" FileName=\\172.10.10.37\部门文件夹\系统平台研发中心\系统硬件部\AD_Library\\AD_Footprint.PcbLib#20 1780,270 r180 top
CON32 "NC/CON4_2MM54，MALE" FileName=\\172.10.10.37\部门文件夹\系统平台研发中心\系统硬件部\AD_Library\\AD_Footprint.PcbLib#20 1100,5550 r180 top
CON33 "CON4_2MM54，MALE" FileName=\\172.10.10.37\部门文件夹\系统平台研发中心\系统硬件部\AD_Library\\AD_Footprint.PcbLib#20 1565,5550 r180 top
D1 "REDLED" FileName=\\172.10.10.37\部门文件夹\系统平台研发中心\系统硬件部\AD_Library\\AD_Footprint.PcbLib#23 6495,1290 r180 top
D2 "UDZS6.8B" FileName=\\172.10.10.37\部门文件夹\系统平台研发中心\系统硬件部\AD_Library\\AD_Footprint.PcbLib#24 6080,4940 r0 top
D3 "RB160-40" FileName=\\172.10.10.37\部门文件夹\系统平台研发中心\系统硬件部\AD_Library\\AD_Footprint.PcbLib#25 1232.5,4835 r270 top
D4 "REDLED" FileName=\\172.10.10.37\部门文件夹\系统平台研发中心\系统硬件部\AD_Library\\AD_Footprint.PcbLib#23 1247.5,4392.83 r180 top
D5 "YELLOWLED" FileName=\\172.10.10.37\部门文件夹\系统平台研发中心\系统硬件部\AD_Library\\AD_Footprint.PcbLib#23 1247,4592 r180 top
D6 "GREENLED" FileName=\\172.10.10.37\部门文件夹\系统平台研发中心\系统硬件部\AD_Library\\AD_Footprint.PcbLib#23 1247,4442 r180 top
D7 "BULELED" FileName=\\172.10.10.37\部门文件夹\系统平台研发中心\系统硬件部\AD_Library\\AD_Footprint.PcbLib#23 1805,4788.5 r270 top
E1 "ESD0603" FileName=\\172.10.10.37\部门文件夹\系统平台研发中心\系统硬件部\AD_Library\\AD_Footprint.PcbLib#26 6360,5089 r270 top value=NP/0603ESDA-MLP
E2 "ESD0603" FileName=\\172.10.10.37\部门文件夹\系统平台研发中心\系统硬件部\AD_Library\\AD_Footprint.PcbLib#26 6660,5015 r180 top value=NP/0603ESDA-MLP
E3 "ESD0603" FileName=\\172.10.10.37\部门文件夹\系统平台研发中心\系统硬件部\AD_Library\\AD_Footprint.PcbLib#26 6660,5070 r180 top value=NP/0603ESDA-MLP
E4 "ESD0603" FileName=\\172.10.10.37\部门文件夹\系统平台研发中心\系统硬件部\AD_Library\\AD_Footprint.PcbLib#26 6660,5125 r180 top value=NP/0603ESDA-MLP
E5 "ESD0603" FileName=\\172.10.10.37\部门文件夹\系统平台研发中心\系统硬件部\AD_Library\\AD_Footprint.PcbLib#26 1142.5,910 r90 top value=NP/0603ESDA-MLP
E6 "ESD0603" FileName=\\172.10.10.37\部门文件夹\系统平台研发中心\系统硬件部\AD_Library\\AD_Footprint.PcbLib#26 1087.5,910 r90 top value=NP/0603ESDA-MLP
E7 "ESD0603" FileName=\\172.10.10.37\部门文件夹\系统平台研发中心\系统硬件部\AD_Library\\AD_Footprint.PcbLib#26 1032.5,910 r90 top value=NP/0603ESDA-MLP
E8 "ESD0603" FileName=\\172.10.10.37\部门文件夹\系统平台研发中心\系统硬件部\AD_Library\\AD_Footprint.PcbLib#26 922.5,910 r90 top value=NP/0603ESDA-MLP
E9 "ESD0603" FileName=\\172.10.10.37\部门文件夹\系统平台研发中心\系统硬件部\AD_Library\\AD_Footprint.PcbLib#26 867.5,910 r90 top value=NP/0603ESDA-MLP
E10 "ESD0603" FileName=\\172.10.10.37\部门文件夹\系统平台研发中心\系统硬件部\AD_Library\\AD_Footprint.PcbLib#26 812.5,910 r90 top value=NP/0603ESDA-MLP
E11 "ESD0603" FileName=\\172.10.10.37\部门文件夹\系统平台研发中心\系统硬件部\AD_Library\\AD_Footprint.PcbLib#26 757.5,910 r90 top value=NP/0603ESDA-MLP
E12 "ESD0603" FileName=\\172.10.10.37\部门文件夹\系统平台研发中心\系统硬件部\AD_Library\\AD_Footprint.PcbLib#26 505,5280 r270 top value=NP/0603ESDA-MLP
E13 "ESD0603" FileName=\\172.10.10.37\部门文件夹\系统平台研发中心\系统硬件部\AD_Library\\AD_Footprint.PcbLib#26 570,5280 r270 top value=NP/0603ESDA-MLP
E14 "ESD0603" FileName=\\172.10.10.37\部门文件夹\系统平台研发中心\系统硬件部\AD_Library\\AD_Footprint.PcbLib#26 625,5280 r270 top value=NP/0603ESDA-MLP
E15 "ESD0603" FileName=\\172.10.10.37\部门文件夹\系统平台研发中心\系统硬件部\AD_Library\\AD_Footprint.PcbLib#26 265,2110 r0 top value=NP/0603ESDA-MLP
E16 "ESD0603" FileName=\\172.10.10.37\部门文件夹\系统平台研发中心\系统硬件部\AD_Library\\AD_Footprint.PcbLib#26 265,2205 r0 top value=NP/0603ESDA-MLP
E19 "ESD0603" FileName=\\172.10.10.37\部门文件夹\系统平台研发中心\系统硬件部\AD_Library\\AD_Footprint.PcbLib#26 5265,1575 r180 top value=NP/0603ESDA-MLP
E20 "ESD0603" FileName=\\172.10.10.37\部门文件夹\系统平台研发中心\系统硬件部\AD_Library\\AD_Footprint.PcbLib#26 1040,1710 r0 top value=NP/0603ESDA-MLP
E25 "ESD0603" FileName=\\172.10.10.37\部门文件夹\系统平台研发中心\系统硬件部\AD_Library\\AD_Footprint.PcbLib#26 4531.42,1920 r90 top value=NP/0603ESDA-MLP
F1 "FUSE1206" FileName=\\172.10.10.37\部门文件夹\系统平台研发中心\系统硬件部\AD_Library\\AD_Footprint.PcbLib#4 6515,1817 r180 top value=Fuse
FB1 "FB0805" FileName=\\172.10.10.37\部门文件夹\系统平台研发中心\系统硬件部\AD_Library\\AD_Footprint.PcbLib#27 3044.4,1670 r0 top
FB2 "FB0805" FileName=\\172.10.10.37\部门文件夹\系统平台研发中心\系统硬件部\AD_Library\\AD_Footprint.PcbLib#27 3350,1670 r0 top
FB3 "FB0805" FileName=\\172.10.10.37\部门文件夹\系统平台研发中心\系统硬件部\AD_Library\\AD_Footprint.PcbLib#27 6682.5,5257.64 r180 top
FB4 "FB0805" FileName=\\172.10.10.37\部门文件夹\系统平台研发中心\系统硬件部\AD_Library\\AD_Footprint.PcbLib#27 6005,4372.5 r270 top
FB5 "FB0805" FileName=\\172.10.10.37\部门文件夹\系统平台研发中心\系统硬件部\AD_Library\\AD_Footprint.PcbLib#27 4425.5,805 r0 top
FB6 "FB0805" FileName=\\172.10.10.37\部门文件夹\系统平台研发中心\系统硬件部\AD_Library\\AD_Footprint.PcbLib#27 1365,1015.5 r270 top value=NC/FB0805
FB8 "FB0805" FileName=\\172.10.10.37\部门文件夹\系统平台研发中心\系统硬件部\AD_Library\\AD_Footprint.PcbLib#27 557.5,385.75 r180 top
FB9 "600R/100MHz" FileName=\\172.10.10.37\部门文件夹\系统平台研发中心\系统硬件部\AD_Library\\AD_Footprint.PcbLib#2 872.5,4880 r90 top
FB10 "600R/100MHz" FileName=\\172.10.10.37\部门文件夹\系统平台研发中心\系统硬件部\AD_Library\\AD_Footprint.PcbLib#2 637.5,4715 r0 top
FB11 "600R/100MHz" FileName=\\172.10.10.37\部门文件夹\系统平台研发中心\系统硬件部\AD_Library\\AD_Footprint.PcbLib#2 637.5,4480 r0 top
FB12 "600R/100MHz" FileName=\\172.10.10.37\部门文件夹\系统平台研发中心\系统硬件部\AD_Library\\AD_Footprint.PcbLib#2 3090,1981.61 r180 top
FB13 "600R/100MHz" FileName=\\172.10.10.37\部门文件夹\系统平台研发中心\系统硬件部\AD_Library\\AD_Footprint.PcbLib#2 3090,2058.39 r180 top
FB14 "600R/100MHz" FileName=\\172.10.10.37\部门文件夹\系统平台研发中心\系统硬件部\AD_Library\\AD_Footprint.PcbLib#2 3090,1919 r0 top
FB15 "FB0805" FileName=\\172.10.10.37\部门文件夹\系统平台研发中心\系统硬件部\AD_Library\\AD_Footprint.PcbLib#27 2706,4170 r0 top
FB16 "FB0805" FileName=\\172.10.10.37\部门文件夹\系统平台研发中心\系统硬件部\AD_Library\\AD_Footprint.PcbLib#27 5839,3125 r180 top
FB17 "600R/100MHz" FileName=\\172.10.10.37\部门文件夹\系统平台研发中心\系统硬件部\AD_Library\\AD_Footprint.PcbLib#2 1860,4910 r90 top
FB18 "FB0805" FileName=\\172.10.10.37\部门文件夹\系统平台研发中心\系统硬件部\AD_Library\\AD_Footprint.PcbLib#27 3545,4115 r180 top
FB19 "FB0805" FileName=\\172.10.10.37\部门文件夹\系统平台研发中心\系统硬件部\AD_Library\\AD_Footprint.PcbLib#27 5839,2495 r180 top
FB20 "FB0805" FileName=\\172.10.10.37\部门文件夹\系统平台研发中心\系统硬件部\AD_Library\\AD_Footprint.PcbLib#27 4111,4170 r0 top
FB21 "600R/100MHz" FileName=\\172.10.10.37\部门文件夹\系统平台研发中心\系统硬件部\AD_Library\\AD_Footprint.PcbLib#2 5815,4940 r90 top
FB22 "FB0805" FileName=\\172.10.10.37\部门文件夹\系统平台研发中心\系统硬件部\AD_Library\\AD_Footprint.PcbLib#27 5735,4035 r270 top
FB23 "FB0805" FileName=\\172.10.10.37\部门文件夹\系统平台研发中心\系统硬件部\AD_Library\\AD_Footprint.PcbLib#27 4981,4035 r270 top
FB25 "600R/100MHz" FileName=\\172.10.10.37\部门文件夹\系统平台研发中心\系统硬件部\AD_Library\\AD_Footprint.PcbLib#2 520,1620 r180 top
FB26 "600R/100MHz" FileName=\\172.10.10.37\部门文件夹\系统平台研发中心\系统硬件部\AD_Library\\AD_Footprint.PcbLib#2 4362.5,542.5 r90 top
FB27 "600R/100MHz" FileName=\\172.10.10.37\部门文件夹\系统平台研发中心\系统硬件部\AD_Library\\AD_Footprint.PcbLib#2 4465,542.5 r90 top
FB28 "FB0805" FileName=\\172.10.10.37\部门文件夹\系统平台研发中心\系统硬件部\AD_Library\\AD_Footprint.PcbLib#27 1992,574 r270 top
H1 "HOLE3MM" HOLE3MM 200,100 r0 top
H2 "HOLE3MM" HOLE3MM 6860,100 r0 top
H3 "HOLE3MM" HOLE3MM 6860,5760 r0 top
H4 "HOLE3MM" HOLE3MM 200,5760 r0 top
JP1 "SIP_3P_2MM54，MALE" FileName=\\172.10.10.37\部门文件夹\系统平台研发中心\系统硬件部\AD_Library\\AD_Footprint.PcbLib#22 6380,4750 r270 top
JP2 "SIP_3P_2MM54，MALE" FileName=\\172.10.10.37\部门文件夹\系统平台研发中心\系统硬件部\AD_Library\\AD_Footprint.PcbLib#22 6260,4750 r270 top
JP5 "SIP_3P_2MM54，MALE" FileName=\\172.10.10.37\部门文件夹\系统平台研发中心\系统硬件部\AD_Library\\AD_Footprint.PcbLib#22 2130,980 r270 top
K1 "KEY_4P_SMD_6X6MM" FileName=\\172.10.10.37\部门文件夹\系统平台研发中心\系统硬件部\AD_Library\\AD_Footprint.PcbLib#28 5600,860 r0 top
K2 "KEY_4P_SMD_6X6MM" FileName=\\172.10.10.37\部门文件夹\系统平台研发中心\系统硬件部\AD_Library\\AD_Footprint.PcbLib#28 5600,1580 r0 top
K3 "KEY_4P_SMD_6X6MM" FileName=\\172.10.10.37\部门文件夹\系统平台研发中心\系统硬件部\AD_Library\\AD_Footprint.PcbLib#28 5600,1220 r0 top
K4 "KEY_4P_SMD_6X6MM" FileName=\\172.10.10.37\部门文件夹\系统平台研发中心\系统硬件部\AD_Library\\AD_Footprint.PcbLib#28 840,1500 r270 top
K5 "KEY_4P_SMD_6X6MM" FileName=\\172.10.10.37\部门文件夹\系统平台研发中心\系统硬件部\AD_Library\\AD_Footprint.PcbLib#28 6140,1580 r0 top
K6 "KEY_4P_SMD_6X6MM" FileName=\\172.10.10.37\部门文件夹\系统平台研发中心\系统硬件部\AD_Library\\AD_Footprint.PcbLib#28 6140,1220 r0 top
K7 "KEY_4P_SMD_6X6MM" FileName=\\172.10.10.37\部门文件夹\系统平台研发中心\系统硬件部\AD_Library\\AD_Footprint.PcbLib#28 6140,860 r0 top
K8 "KEY_4P_SMD_6X6MM" FileName=\\172.10.10.37\部门文件夹\系统平台研发中心\系统硬件部\AD_Library\\AD_Footprint.PcbLib#28 6660,860 r0 top
K9 "KEY_4P_SMD_6X6MM" FileName=\\172.10.10.37\部门文件夹\系统平台研发中心\系统硬件部\AD_Library\\AD_Footprint.PcbLib#28 4620,1500 r270 top
L1 "4.7uH,SWPA3012S4R7MT" FileName=\\172.10.10.37\部门文件夹\系统平台研发中心\系统硬件部\AD_Library\\AD_Footprint.PcbLib#29 3045,1390 r270 top value=4.7uH,SWPA3012S2R2MT
L2 "4.7uH,SWPA3012S4R7MT" FileName=\\172.10.10.37\部门文件夹\系统平台研发中心\系统硬件部\AD_Library\\AD_Footprint.PcbLib#29 3350,1390 r270 top value=4.7uH,SWPA3012S2R2MT
L3 "4.7uH,SWPA3012S4R7MT" FileName=\\172.10.10.37\部门文件夹\系统平台研发中心\系统硬件部\AD_Library\\AD_Footprint.PcbLib#29 5660,4371.9 r180 top value=4.7uH,SWPA3012S2R2MT
MK1 "FIDU_40" FileName=\\172.10.10.37\部门文件夹\系统平台研发中心\系统硬件部\AD_Library\AD_Footprint.PcbLib#2 5600,560 r0 top
MK2 "FIDU_40" FileName=\\172.10.10.37\部门文件夹\系统平台研发中心\系统硬件部\AD_Library\AD_Footprint.PcbLib#2 1212.5,3805 r0 top
Q1 "AO3415" FileName=\\172.10.10.37\部门文件夹\系统平台研发中心\系统硬件部\AD_Library\\AD_Footprint.PcbLib#30 6235,5080 r90 top
Q2 "AO3415" FileName=\\172.10.10.37\部门文件夹\系统平台研发中心\系统硬件部\AD_Library\\AD_Footprint.PcbLib#30 6235,4934.5 r90 top
Q3 "AO3415" AO3413_SOT23_GDS_P 1335,1013 r0 top
Q4 "2N3904/PMBT3904" FileName=\\172.10.10.37\部门文件夹\系统平台研发中心\系统硬件部\AD_Library\\AD_Footprint.PcbLib#31 1788.5,4657 r270 top value=2N3904/PMPT3904
Q5 "AO3416" FileName=\\172.10.10.37\部门文件夹\系统平台研发中心\系统硬件部\AD_Library\\AD_Footprint.PcbLib#30 3202.5,3252.5 r90 top
Q6 "2N3904/PMBT3904" FileName=\\172.10.10.37\部门文件夹\系统平台研发中心\系统硬件部\AD_Library\\AD_Footprint.PcbLib#31 3202.5,3125 r270 top value=2N3904/PMPT3904
Q7 "AO3415" FileName=\\172.10.10.37\部门文件夹\系统平台研发中心\系统硬件部\AD_Library\\AD_Footprint.PcbLib#30 1850,627.5 r0 top
Q8 "AO3415" FileName=\\172.10.10.37\部门文件夹\系统平台研发中心\系统硬件部\AD_Library\\AD_Footprint.PcbLib#30 1850,790 r0 top
R1 "4.7K" FileName=\\172.10.10.37\部门文件夹\系统平台研发中心\系统硬件部\AD_Library\\AD_Footprint.PcbLib#2 2905,1670 r0 top
R2 "500K" FileName=\\172.10.10.37\部门文件夹\系统平台研发中心\系统硬件部\AD_Library\\AD_Footprint.PcbLib#2 2905,1620 r180 top
R3 "100K" FileName=\\172.10.10.37\部门文件夹\系统平台研发中心\系统硬件部\AD_Library\\AD_Footprint.PcbLib#2 2905,1520 r0 top
R4 "1K" FileName=\\172.10.10.37\部门文件夹\系统平台研发中心\系统硬件部\AD_Library\\AD_Footprint.PcbLib#32 6600,1290 r0 top
R5 "4.7K" FileName=\\172.10.10.37\部门文件夹\系统平台研发中心\系统硬件部\AD_Library\\AD_Footprint.PcbLib#2 3220,1670 r0 top
R6 "549K" FileName=\\172.10.10.37\部门文件夹\系统平台研发中心\系统硬件部\AD_Library\\AD_Footprint.PcbLib#2 3220,1620 r180 top
R7 "120K" FileName=\\172.10.10.37\部门文件夹\系统平台研发中心\系统硬件部\AD_Library\\AD_Footprint.PcbLib#2 3220,1520 r0 top
R8 "100K" FileName=\\172.10.10.37\部门文件夹\系统平台研发中心\系统硬件部\AD_Library\\AD_Footprint.PcbLib#2 6005,4502.5 r270 top
R9 "549K" FileName=\\172.10.10.37\部门文件夹\系统平台研发中心\系统硬件部\AD_Library\\AD_Footprint.PcbLib#2 5850,4502.5 r90 top
R10 "510R" FileName=\\172.10.10.37\部门文件夹\系统平台研发中心\系统硬件部\AD_Library\\AD_Footprint.PcbLib#2 5720,4502.5 r90 top
R11 "120K" FileName=\\172.10.10.37\部门文件夹\系统平台研发中心\系统硬件部\AD_Library\\AD_Footprint.PcbLib#2 5950,4502.5 r270 top
R12 "4.7K" FileName=\\172.10.10.37\部门文件夹\系统平台研发中心\系统硬件部\AD_Library\\AD_Footprint.PcbLib#2 4280,776 r90 top
R13 "NC/10K" FileName=\\172.10.10.37\部门文件夹\系统平台研发中心\系统硬件部\AD_Library\\AD_Footprint.PcbLib#2 1142.5,1027.5 r90 top
R14 "NC/10K" FileName=\\172.10.10.37\部门文件夹\系统平台研发中心\系统硬件部\AD_Library\\AD_Footprint.PcbLib#2 1087.5,1027.5 r90 top
R15 "NC/10K" FileName=\\172.10.10.37\部门文件夹\系统平台研发中心\系统硬件部\AD_Library\\AD_Footprint.PcbLib#2 1032.5,1027.5 r90 top
R16 "10K" FileName=\\172.10.10.37\部门文件夹\系统平台研发中心\系统硬件部\AD_Library\\AD_Footprint.PcbLib#2 977.5,1027.5 r90 top
R17 "NC/10K" FileName=\\172.10.10.37\部门文件夹\系统平台研发中心\系统硬件部\AD_Library\\AD_Footprint.PcbLib#2 867.5,1027.5 r90 top
R18 "NC/10K" FileName=\\172.10.10.37\部门文件夹\系统平台研发中心\系统硬件部\AD_Library\\AD_Footprint.PcbLib#2 812.5,1027.5 r90 top
R19 "10K" FileName=\\172.10.10.37\部门文件夹\系统平台研发中心\系统硬件部\AD_Library\\AD_Footprint.PcbLib#2 757.5,1027.5 r90 top
R20 "22R" FileName=\\172.10.10.37\部门文件夹\系统平台研发中心\系统硬件部\AD_Library\\AD_Footprint.PcbLib#2 1455,712.5 r180 top
R21 "22R" FileName=\\172.10.10.37\部门文件夹\系统平台研发中心\系统硬件部\AD_Library\\AD_Footprint.PcbLib#2 1455,662.5 r180 top
R22 "22R" FileName=\\172.10.10.37\部门文件夹\系统平台研发中心\系统硬件部\AD_Library\\AD_Footprint.PcbLib#2 1455,612.5 r180 top
R23 "100K" FileName=\\172.10.10.37\部门文件夹\系统平台研发中心\系统硬件部\AD_Library\\AD_Footprint.PcbLib#2 1335,905 r0 top
R24 "22R" FileName=\\172.10.10.37\部门文件夹\系统平台研发中心\系统硬件部\AD_Library\\AD_Footprint.PcbLib#2 1455,562.5 r180 top
R25 "22R" FileName=\\172.10.10.37\部门文件夹\系统平台研发中心\系统硬件部\AD_Library\\AD_Footprint.PcbLib#2 1455,512.5 r180 top
R26 "22R" FileName=\\172.10.10.37\部门文件夹\系统平台研发中心\系统硬件部\AD_Library\\AD_Footprint.PcbLib#2 1455,462.5 r180 top
R27 "1K" FileName=\\172.10.10.37\部门文件夹\系统平台研发中心\系统硬件部\AD_Library\\AD_Footprint.PcbLib#2 1455,762.5 r0 top
R28 "22R" FileName=\\172.10.10.37\部门文件夹\系统平台研发中心\系统硬件部\AD_Library\\AD_Footprint.PcbLib#2 1455,412.5 r180 top
R29 "10K" FileName=\\172.10.10.37\部门文件夹\系统平台研发中心\系统硬件部\AD_Library\\AD_Footprint.PcbLib#2 1245.5,4642 r0 top
R30 "33R" FileName=\\172.10.10.37\部门文件夹\系统平台研发中心\系统硬件部\AD_Library\\AD_Footprint.PcbLib#2 3260,2115 r180 top
R31 "1K" FileName=\\172.10.10.37\部门文件夹\系统平台研发中心\系统硬件部\AD_Library\\AD_Footprint.PcbLib#2 3475,1860 r0 top
R32 "12K" FileName=\\172.10.10.37\部门文件夹\系统平台研发中心\系统硬件部\AD_Library\\AD_Footprint.PcbLib#2 637.5,4615 r0 top
R33 "1K" FileName=\\172.10.10.37\部门文件夹\系统平台研发中心\系统硬件部\AD_Library\\AD_Footprint.PcbLib#2 1245.5,4492 r0 top
R34 "1K" FileName=\\172.10.10.37\部门文件夹\系统平台研发中心\系统硬件部\AD_Library\\AD_Footprint.PcbLib#2 1246,4344 r0 top
R35 "1K" FileName=\\172.10.10.37\部门文件夹\系统平台研发中心\系统硬件部\AD_Library\\AD_Footprint.PcbLib#2 1245.5,4542 r0 top
R36 "0R" FileName=\\172.10.10.37\部门文件夹\系统平台研发中心\系统硬件部\AD_Library\\AD_Footprint.PcbLib#2 3475,2010 r0 top
R37 "0R" FileName=\\172.10.10.37\部门文件夹\系统平台研发中心\系统硬件部\AD_Library\\AD_Footprint.PcbLib#2 3475,2060 r0 top
R46 "0R" FileName=\\172.10.10.37\部门文件夹\系统平台研发中心\系统硬件部\AD_Library\\AD_Footprint.PcbLib#2 5830,2960 r0 top
R47 "0R" FileName=\\172.10.10.37\部门文件夹\系统平台研发中心\系统硬件部\AD_Library\\AD_Footprint.PcbLib#2 5415,2380 r90 top
R48 "0R" FileName=\\172.10.10.37\部门文件夹\系统平台研发中心\系统硬件部\AD_Library\\AD_Footprint.PcbLib#2 5830,2910 r0 top
R49 "0R" FileName=\\172.10.10.37\部门文件夹\系统平台研发中心\系统硬件部\AD_Library\\AD_Footprint.PcbLib#2 5465,2380 r90 top
R50 "220R" FileName=\\172.10.10.37\部门文件夹\系统平台研发中心\系统硬件部\AD_Library\\AD_Footprint.PcbLib#2 1804.92,4910 r90 top
R51 "0R" FileName=\\172.10.10.37\部门文件夹\系统平台研发中心\系统硬件部\AD_Library\\AD_Footprint.PcbLib#2 5830,2860 r0 top
R52 "0R" FileName=\\172.10.10.37\部门文件夹\系统平台研发中心\系统硬件部\AD_Library\\AD_Footprint.PcbLib#2 5515,2380 r90 top
R58 "220R" FileName=\\172.10.10.37\部门文件夹\系统平台研发中心\系统硬件部\AD_Library\\AD_Footprint.PcbLib#2 1745,4910 r90 top
R59 "0R" FileName=\\172.10.10.37\部门文件夹\系统平台研发中心\系统硬件部\AD_Library\\AD_Footprint.PcbLib#2 5830,2810 r0 top
R60 "0R" FileName=\\172.10.10.37\部门文件夹\系统平台研发中心\系统硬件部\AD_Library\\AD_Footprint.PcbLib#2 5565,2380 r90 top
R61 "0R" FileName=\\172.10.10.37\部门文件夹\系统平台研发中心\系统硬件部\AD_Library\\AD_Footprint.PcbLib#2 5830,2760 r0 top
R62 "0R" FileName=\\172.10.10.37\部门文件夹\系统平台研发中心\系统硬件部\AD_Library\\AD_Footprint.PcbLib#2 5615,2380 r90 top
R63 "0R" FileName=\\172.10.10.37\部门文件夹\系统平台研发中心\系统硬件部\AD_Library\\AD_Footprint.PcbLib#2 5830,2710 r0 top
R64 "0R" FileName=\\172.10.10.37\部门文件夹\系统平台研发中心\系统硬件部\AD_Library\\AD_Footprint.PcbLib#2 5665,2380 r90 top
R65 "0R" FileName=\\172.10.10.37\部门文件夹\系统平台研发中心\系统硬件部\AD_Library\\AD_Footprint.PcbLib#2 5830,2660 r0 top
R66 "75R" FileName=\\172.10.10.37\部门文件夹\系统平台研发中心\系统硬件部\AD_Library\\AD_Footprint.PcbLib#2 2525,5215 r180 top
R67 "75R" FileName=\\172.10.10.37\部门文件夹\系统平台研发中心\系统硬件部\AD_Library\\AD_Footprint.PcbLib#2 2525,5165 r180 top
R68 "33R" FileName=\\172.10.10.37\部门文件夹\系统平台研发中心\系统硬件部\AD_Library\\AD_Footprint.PcbLib#2 4380,4385 r90 top
R69 "0R" FileName=\\172.10.10.37\部门文件夹\系统平台研发中心\系统硬件部\AD_Library\\AD_Footprint.PcbLib#2 4430,4385 r90 top
R70 "0R" FileName=\\172.10.10.37\部门文件夹\系统平台研发中心\系统硬件部\AD_Library\\AD_Footprint.PcbLib#2 5032.5,3847.5 r270 top
R71 "0R" FileName=\\172.10.10.37\部门文件夹\系统平台研发中心\系统硬件部\AD_Library\\AD_Footprint.PcbLib#2 5082.5,3847.5 r270 top
R74 "0R" FileName=\\172.10.10.37\部门文件夹\系统平台研发中心\系统硬件部\AD_Library\\AD_Footprint.PcbLib#2 4490,4385 r90 top
R75 "0R" FileName=\\172.10.10.37\部门文件夹\系统平台研发中心\系统硬件部\AD_Library\\AD_Footprint.PcbLib#2 5132.5,3847.5 r270 top
R76 "220R" FileName=\\172.10.10.37\部门文件夹\系统平台研发中心\系统硬件部\AD_Library\\AD_Footprint.PcbLib#2 5222.5,5080 r0 top
R77 "0R" FileName=\\172.10.10.37\部门文件夹\系统平台研发中心\系统硬件部\AD_Library\\AD_Footprint.PcbLib#2 4540,4385 r90 top
R78 "0R" FileName=\\172.10.10.37\部门文件夹\系统平台研发中心\系统硬件部\AD_Library\\AD_Footprint.PcbLib#2 5182.5,3847.5 r270 top
R79 "0R" FileName=\\172.10.10.37\部门文件夹\系统平台研发中心\系统硬件部\AD_Library\\AD_Footprint.PcbLib#2 4590,4385 r90 top
R80 "0R" FileName=\\172.10.10.37\部门文件夹\系统平台研发中心\系统硬件部\AD_Library\\AD_Footprint.PcbLib#2 5232.5,3847.5 r270 top
R81 "220R" FileName=\\172.10.10.37\部门文件夹\系统平台研发中心\系统硬件部\AD_Library\\AD_Footprint.PcbLib#2 5222.5,5130 r0 top
R83 "75R" FileName=\\172.10.10.37\部门文件夹\系统平台研发中心\系统硬件部\AD_Library\\AD_Footprint.PcbLib#2 5222.5,5180 r0 top
R84 "75R" FileName=\\172.10.10.37\部门文件夹\系统平台研发中心\系统硬件部\AD_Library\\AD_Footprint.PcbLib#2 5222.5,5230 r0 top
R85 "220R" FileName=\\172.10.10.37\部门文件夹\系统平台研发中心\系统硬件部\AD_Library\\AD_Footprint.PcbLib#2 1860,4790 r90 top
R86 "1K" FileName=\\172.10.10.37\部门文件夹\系统平台研发中心\系统硬件部\AD_Library\\AD_Footprint.PcbLib#2 1745,4790 r90 top
R87 "NC/10K" FileName=\\172.10.10.37\部门文件夹\系统平台研发中心\系统硬件部\AD_Library\\AD_Footprint.PcbLib#2 520,1520 r0 top
R88 "NC/10K" FileName=\\172.10.10.37\部门文件夹\系统平台研发中心\系统硬件部\AD_Library\\AD_Footprint.PcbLib#2 520,1370 r0 top
R89 "NC/10K" FileName=\\172.10.10.37\部门文件夹\系统平台研发中心\系统硬件部\AD_Library\\AD_Footprint.PcbLib#2 520,1270 r0 top
R90 "NC/10K" FileName=\\172.10.10.37\部门文件夹\系统平台研发中心\系统硬件部\AD_Library\\AD_Footprint.PcbLib#2 520,1020 r0 top
R91 "22R" FileName=\\172.10.10.37\部门文件夹\系统平台研发中心\系统硬件部\AD_Library\\AD_Footprint.PcbLib#2 520,1470 r0 top
R92 "0R" FileName=\\172.10.10.37\部门文件夹\系统平台研发中心\系统硬件部\AD_Library\\AD_Footprint.PcbLib#2 4532.5,542.5 r90 top
R93 "22R" FileName=\\172.10.10.37\部门文件夹\系统平台研发中心\系统硬件部\AD_Library\\AD_Footprint.PcbLib#2 520,1420 r0 top
R94 "0R" FileName=\\172.10.10.37\部门文件夹\系统平台研发中心\系统硬件部\AD_Library\\AD_Footprint.PcbLib#2 4650.63,542.5 r270 top
R95 "22R" FileName=\\172.10.10.37\部门文件夹\系统平台研发中心\系统硬件部\AD_Library\\AD_Footprint.PcbLib#2 520,1320 r0 top
R96 "0R" FileName=\\172.10.10.37\部门文件夹\系统平台研发中心\系统硬件部\AD_Library\\AD_Footprint.PcbLib#2 4705,542.5 r90 top
R97 "22R" FileName=\\172.10.10.37\部门文件夹\系统平台研发中心\系统硬件部\AD_Library\\AD_Footprint.PcbLib#2 520,1220 r0 top
R98 "0R" FileName=\\172.10.10.37\部门文件夹\系统平台研发中心\系统硬件部\AD_Library\\AD_Footprint.PcbLib#2 4755,542.5 r90 top
R99 "0R" FileName=\\172.10.10.37\部门文件夹\系统平台研发中心\系统硬件部\AD_Library\\AD_Footprint.PcbLib#2 4808.11,542.5 r270 top
R100 "22R" FileName=\\172.10.10.37\部门文件夹\系统平台研发中心\系统硬件部\AD_Library\\AD_Footprint.PcbLib#2 520,1120 r0 top
R101 "0R" FileName=\\172.10.10.37\部门文件夹\系统平台研发中心\系统硬件部\AD_Library\\AD_Footprint.PcbLib#2 4860,542.5 r90 top
R102 "22R" FileName=\\172.10.10.37\部门文件夹\系统平台研发中心\系统硬件部\AD_Library\\AD_Footprint.PcbLib#2 520,970 r0 top
R103 "0R" FileName=\\172.10.10.37\部门文件夹\系统平台研发中心\系统硬件部\AD_Library\\AD_Footprint.PcbLib#2 4925,542.5 r90 top
R104 "0R" FileName=\\172.10.10.37\部门文件夹\系统平台研发中心\系统硬件部\AD_Library\\AD_Footprint.PcbLib#2 4990,542.5 r90 top
R105 "0R" FileName=\\172.10.10.37\部门文件夹\系统平台研发中心\系统硬件部\AD_Library\\AD_Footprint.PcbLib#2 5044.33,542.5 r270 top
R106 "NC/10K" FileName=\\172.10.10.37\部门文件夹\系统平台研发中心\系统硬件部\AD_Library\\AD_Footprint.PcbLib#2 520,1070 r180 top
R107 "NC/10K" FileName=\\172.10.10.37\部门文件夹\系统平台研发中心\系统硬件部\AD_Library\\AD_Footprint.PcbLib#2 520,1170 r180 top
R108 "10K" FileName=\\172.10.10.37\部门文件夹\系统平台研发中心\系统硬件部\AD_Library\\AD_Footprint.PcbLib#2 5265,1490 r180 top
R111 "0R" FileName=\\172.10.10.37\部门文件夹\系统平台研发中心\系统硬件部\AD_Library\\AD_Footprint.PcbLib#2 1922.5,1275 r180 top
R112 "0R" FileName=\\172.10.10.37\部门文件夹\系统平台研发中心\系统硬件部\AD_Library\\AD_Footprint.PcbLib#2 1922.5,1225 r180 top
R113 "0R" FileName=\\172.10.10.37\部门文件夹\系统平台研发中心\系统硬件部\AD_Library\\AD_Footprint.PcbLib#2 1922.5,1175 r180 top
R116 "4.7R" FileName=\\172.10.10.37\部门文件夹\系统平台研发中心\系统硬件部\AD_Library\\AD_Footprint.PcbLib#2 1040,1650 r0 top
R117 "0R" FileName=\\172.10.10.37\部门文件夹\系统平台研发中心\系统硬件部\AD_Library\\AD_Footprint.PcbLib#2 1922.5,1325 r180 top
R118 "0R" FileName=\\172.10.10.37\部门文件夹\系统平台研发中心\系统硬件部\AD_Library\\AD_Footprint.PcbLib#2 1922.5,1375 r180 top
R119 "0R" FileName=\\172.10.10.37\部门文件夹\系统平台研发中心\系统硬件部\AD_Library\\AD_Footprint.PcbLib#2 1922.5,1425 r180 top
R122 "100K" FileName=\\172.10.10.37\部门文件夹\系统平台研发中心\系统硬件部\AD_Library\\AD_Footprint.PcbLib#2 3188,3355 r0 top
R123 "1M" FileName=\\172.10.10.37\部门文件夹\系统平台研发中心\系统硬件部\AD_Library\\AD_Footprint.PcbLib#2 2715,4055 r0 top
R124 "10K" FileName=\\172.10.10.37\部门文件夹\系统平台研发中心\系统硬件部\AD_Library\\AD_Footprint.PcbLib#2 3090,3134 r90 top
R125 "NC/0R" FileName=\\172.10.10.37\部门文件夹\系统平台研发中心\系统硬件部\AD_Library\\AD_Footprint.PcbLib#2 2955,565 r90 top
R126 "NC/0R" FileName=\\172.10.10.37\部门文件夹\系统平台研发中心\系统硬件部\AD_Library\\AD_Footprint.PcbLib#2 2905,565 r90 top
R127 "NC/0R" FileName=\\172.10.10.37\部门文件夹\系统平台研发中心\系统硬件部\AD_Library\\AD_Footprint.PcbLib#2 2855,565 r90 top
R128 "NC/0R" FileName=\\172.10.10.37\部门文件夹\系统平台研发中心\系统硬件部\AD_Library\\AD_Footprint.PcbLib#2 2805,565 r90 top
R129 "NC/0R" FileName=\\172.10.10.37\部门文件夹\系统平台研发中心\系统硬件部\AD_Library\\AD_Footprint.PcbLib#2 2755,565 r90 top
R130 "NC/0R" FileName=\\172.10.10.37\部门文件夹\系统平台研发中心\系统硬件部\AD_Library\\AD_Footprint.PcbLib#2 2705,565 r90 top
R131 "NC/0R" FileName=\\172.10.10.37\部门文件夹\系统平台研发中心\系统硬件部\AD_Library\\AD_Footprint.PcbLib#2 2655,565 r90 top
R132 "NC/0R" FileName=\\172.10.10.37\部门文件夹\系统平台研发中心\系统硬件部\AD_Library\\AD_Footprint.PcbLib#2 2605,565 r90 top
R133 "NC/0R" FileName=\\172.10.10.37\部门文件夹\系统平台研发中心\系统硬件部\AD_Library\\AD_Footprint.PcbLib#2 2405,565 r90 top
R134 "NC/0R" FileName=\\172.10.10.37\部门文件夹\系统平台研发中心\系统硬件部\AD_Library\\AD_Footprint.PcbLib#2 2455,565 r90 top
R135 "2.2K" FileName=\\172.10.10.37\部门文件夹\系统平台研发中心\系统硬件部\AD_Library\\AD_Footprint.PcbLib#2 5265,1380 r180 top
R136 "3.3K" FileName=\\172.10.10.37\部门文件夹\系统平台研发中心\系统硬件部\AD_Library\\AD_Footprint.PcbLib#2 5265,1330 r0 top
R137 "4.7K" FileName=\\172.10.10.37\部门文件夹\系统平台研发中心\系统硬件部\AD_Library\\AD_Footprint.PcbLib#2 5265,1280 r180 top
R138 "8.2K" FileName=\\172.10.10.37\部门文件夹\系统平台研发中心\系统硬件部\AD_Library\\AD_Footprint.PcbLib#2 5265,1220 r0 top
R139 "20K" FileName=\\172.10.10.37\部门文件夹\系统平台研发中心\系统硬件部\AD_Library\\AD_Footprint.PcbLib#2 5265,1160 r180 top
R140 "100K" FileName=\\172.10.10.37\部门文件夹\系统平台研发中心\系统硬件部\AD_Library\\AD_Footprint.PcbLib#2 5265,1100 r0 top
R141 "10K" FileName=\\172.10.10.37\部门文件夹\系统平台研发中心\系统硬件部\AD_Library\\AD_Footprint.PcbLib#2 1740,805 r90 top
R142 "10K" FileName=\\172.10.10.37\部门文件夹\系统平台研发中心\系统硬件部\AD_Library\\AD_Footprint.PcbLib#2 1242.5,1027.5 r90 top
R143 "1K" FileName=\\172.10.10.37\部门文件夹\系统平台研发中心\系统硬件部\AD_Library\\AD_Footprint.PcbLib#2 1740,685 r270 top
SH1 "SCREWING_H_3MMA" SCREWING_H_3MMA 152.5,5485 r0 top
SH2 "SCREWING_H_3MMA" SCREWING_H_3MMA 6902.5,5485 r0 top
SH3 "SCREWING_H_3MMA" SCREWING_H_3MMA 152.5,1890 r0 top
SH4 "SCREWING_H_3MMA" SCREWING_H_3MMA 6902.5,1890 r0 top
SH5 "SCREWING_H_3MMA" SCREWING_H_3MMA 152.5,340 r0 top
SH6 "SCREWING_H_3MMA" SCREWING_H_3MMA 6902.5,340 r0 top
SW1 "SWITCH_POWER_DC" FileName=\\172.10.10.37\部门文件夹\系统平台研发中心\系统硬件部\AD_Library\\AD_Footprint.PcbLib#33 6810,1560 r270 top
TP1 "Test Point" FileName=\\172.10.10.37\部门文件夹\系统平台研发中心\系统硬件部\AD_Library\\AD_Footprint.PcbLib#34 993.5,5190.5 r0 top
TP2 "Test Point" FileName=\\172.10.10.37\部门文件夹\系统平台研发中心\系统硬件部\AD_Library\\AD_Footprint.PcbLib#34 555,645 r0 top
TP4 "Test Point" FileName=\\172.10.10.37\部门文件夹\系统平台研发中心\系统硬件部\AD_Library\\AD_Footprint.PcbLib#34 6625,5480 r90 top
TP5 "Test Point" FileName=\\172.10.10.37\部门文件夹\系统平台研发中心\系统硬件部\AD_Library\\AD_Footprint.PcbLib#34 2565,2895 r0 top
TP6 "Test Point" FileName=\\172.10.10.37\部门文件夹\系统平台研发中心\系统硬件部\AD_Library\\AD_Footprint.PcbLib#34 5507.5,450 r0 top
TP7 "Test Point" FileName=\\172.10.10.37\部门文件夹\系统平台研发中心\系统硬件部\AD_Library\\AD_Footprint.PcbLib#34 182.5,4850 r0 top
U1 "PAM2312_SOT23_5" FileName=\\172.10.10.37\部门文件夹\系统平台研发中心\系统硬件部\AD_Library\\AD_Footprint.PcbLib#35 3045,1545 r0 top
U2 "PAM2312_SOT23_5" FileName=\\172.10.10.37\部门文件夹\系统平台研发中心\系统硬件部\AD_Library\\AD_Footprint.PcbLib#35 3350,1545 r0 top
U3 "PAM2312_SOT23_5" FileName=\\172.10.10.37\部门文件夹\系统平台研发中心\系统硬件部\AD_Library\\AD_Footprint.PcbLib#35 5810,4371.9 r270 top
U4 "LC1463CB5ATR18_SOT23-5" FileName=\\172.10.10.37\部门文件夹\系统平台研发中心\系统硬件部\AD_Library\\AD_Footprint.PcbLib#35 4370,682.97 r180 top value=LC1463CB5ATR18
U6 "FT232HL_QFP48" FileName=\\172.10.10.37\部门文件夹\系统平台研发中心\系统硬件部\AD_Library\\AD_Footprint.PcbLib#36 957.5,4570 r0 top value=FT232H
U7 "TCS7191E" FileName=\\172.10.10.37\部门文件夹\系统平台研发中心\系统硬件部\AD_Library\\AD_Footprint.PcbLib#37 3275,2020 r180 top
VCC_3V6 "TP40" FileName=\\172.10.10.37\部门文件夹\系统平台研发中心\系统硬件部\AD_Library\\AD_Footprint.PcbLib#38 2912.5,1162.5 r0 top
VDD_3V3 "TP40" FileName=\\172.10.10.37\部门文件夹\系统平台研发中心\系统硬件部\AD_Library\\AD_Footprint.PcbLib#38 3220,1105 r0 top
WIFI_3V3 "TP40" FileName=\\172.10.10.37\部门文件夹\系统平台研发中心\系统硬件部\AD_Library\\AD_Footprint.PcbLib#38 5411.6,4371.6 r270 top
Y1 "12MHz,CL=12pF,20ppm,3225" Y_3MM2X2MM5 582.5,4820 r0 top value=12M,12pF

## Footprints (in the part's own frame and the unit in brackets; to place one, negate y for a bottom-side part, rotate by r counter-clockwise, add the part's x,y. Pads: shape width x height; smd on the part's side, far side on the other; paste and mask are expansions set on the pad)
AO3413_SOT23_GDS_P [mil]
  oval 30x48 smd: D(0,43.5) G(-38,-43.5) S(38,-43.5)
  silkscreen extent -63,-75 63,75
FileName=\\172.10.10.37\部门文件夹\系统平台研发中心\系统硬件部\AD_Library\\AD_Footprint.PcbLib#1 [mm]
  rect 3x2 smd: 1(8.813,0) 2(-9.247,0)
  round 1.1 / inner round 1.524 / far side round 1.1 hole 1.1: 3(-3.8,0) 4(3.7,0)
  silkscreen extent -7.96,-7.76 9.5,7.76
FileName=\\172.10.10.37\部门文件夹\系统平台研发中心\系统硬件部\AD_Library\\AD_Footprint.PcbLib#2 [mm]
  rect 0.762x0.813 smd: 1(-0.737,0) 2(0.737,0)
  silkscreen extent -1.38,-0.64 1.38,0.64
FileName=\\172.10.10.37\部门文件夹\系统平台研发中心\系统硬件部\AD_Library\\AD_Footprint.PcbLib#3 [mm]
  rect 1.905x2.286 smd: 1(1.714,0) 2(-1.714,0)
  silkscreen extent -3.17,-1.65 3.17,1.65
FileName=\\172.10.10.37\部门文件夹\系统平台研发中心\系统硬件部\AD_Library\\AD_Footprint.PcbLib#4 [mm]
  rect 1.524x1.143 smd: 1(0,1.206) 2(0,-1.206)
  silkscreen extent -0.89,-2.1 0.89,2.1
FileName=\\172.10.10.37\部门文件夹\系统平台研发中心\系统硬件部\AD_Library\\AD_Footprint.PcbLib#5 [mm]
  rect 1.295x2.794 smd: 1(-1.27,0) 2(1.27,0)
  silkscreen extent -2.03,-1.52 2.03,1.52
FileName=\\172.10.10.37\部门文件夹\系统平台研发中心\系统硬件部\AD_Library\\AD_Footprint.PcbLib#6 [mm]
  oval 0.3x1.6 smd: 1(-4.75,-1.8) 2(-4.75,1.8) 3(-4.25,-1.8) 4(-4.25,1.8) 5(-3.75,-1.8) 6(-3.75,1.8) 7(-3.25,-1.8) 8(-3.25,1.8) 9(-2.75,-1.8) 10(-2.75,1.8) 11(-2.25,-1.8) 12(-2.25,1.8) 13(-1.75,-1.8) 14(-1.75,1.8) 15(-1.25,-1.8) 16(-1.25,1.8) 17(-0.75,-1.8) 18(-0.75,1.8) 19(-0.25,-1.8) 20(-0.25,1.8) 21(0.25,-1.8) 22(0.25,1.8) 23(0.75,-1.8) 24(0.75,1.8) 25(1.25,-1.8) 26(1.25,1.8) 27(1.75,-1.8) 28(1.75,1.8) 29(2.25,-1.8) 30(2.25,1.8) 31(2.75,-1.8) 32(2.75,1.8) 33(3.25,-1.8) 34(3.25,1.8) 35(3.75,-1.8) 36(3.75,1.8) 37(4.25,-1.8) 38(4.25,1.8) 39(4.75,-1.8) 40(4.75,1.8)
  rect 0.8x2 smd: 41(-6.5,0) 42(6.5,0)
  round 0.6 hole 0.6 unplated: 43(-5.8,1.5) 44(5.8,1.5)
  silkscreen extent -7,-2.5 7,1.8
FileName=\\172.10.10.37\部门文件夹\系统平台研发中心\系统硬件部\AD_Library\\AD_Footprint.PcbLib#7 [mm]
  oval 0.3x1.6 smd: 1(-6,-1.8) 2(-6,1.8) 3(-5.5,-1.8) 4(-5.5,1.8) 5(-5,-1.8) 6(-5,1.8) 7(-4.5,-1.8) 8(-4.5,1.8) 9(-4,-1.8) 10(-4,1.8) 11(-3.5,-1.8) 12(-3.5,1.8) 13(-3,-1.8) 14(-3,1.8) 15(-2.5,-1.8) 16(-2.5,1.8) 17(-2,-1.8) 18(-2,1.8) 19(-1.5,-1.8) 20(-1.5,1.8) 21(-1,-1.8) 22(-1,1.8) 23(-0.5,-1.8) 24(-0.5,1.8) 25(0,-1.8) 26(0,1.8) 27(0.5,-1.8) 28(0.5,1.8) 29(1,-1.8) 30(1,1.8) 31(1.5,-1.8) 32(1.5,1.8) 33(2,-1.8) 34(2,1.8) 35(2.5,-1.8) 36(2.5,1.8) 37(3,-1.8) 38(3,1.8) 39(3.5,-1.8) 40(3.5,1.8) 41(4,-1.8) 42(4,1.8) 43(4.5,-1.8) 44(4.5,1.8) 45(5,-1.8) 46(5,1.8) 47(5.5,-1.8) 48(5.5,1.8) 49(6,-1.8) 50(6,1.8)
  rect 0.8x2 smd: 51(-7.75,0) 52(7.75,0)
  round 0.6 smd: 53(-7.05,1.5) 54(7.05,1.5)
  silkscreen extent -8.5,-2.5 8.5,2